# Altium PCB PCB1.PcbDoc
Units mm, origin at the board's own origin, x right, y up, seen from the top; angles counter-clockwise.
Board outline 200 x 140 mm, 4 copper layers (Top Layer, InternalPlane2, InternalPlane1, Bottom Layer); 152 components, 200 nets, 699 pads, 125 vias.
Unrouted connection lines stored in the file: 69.
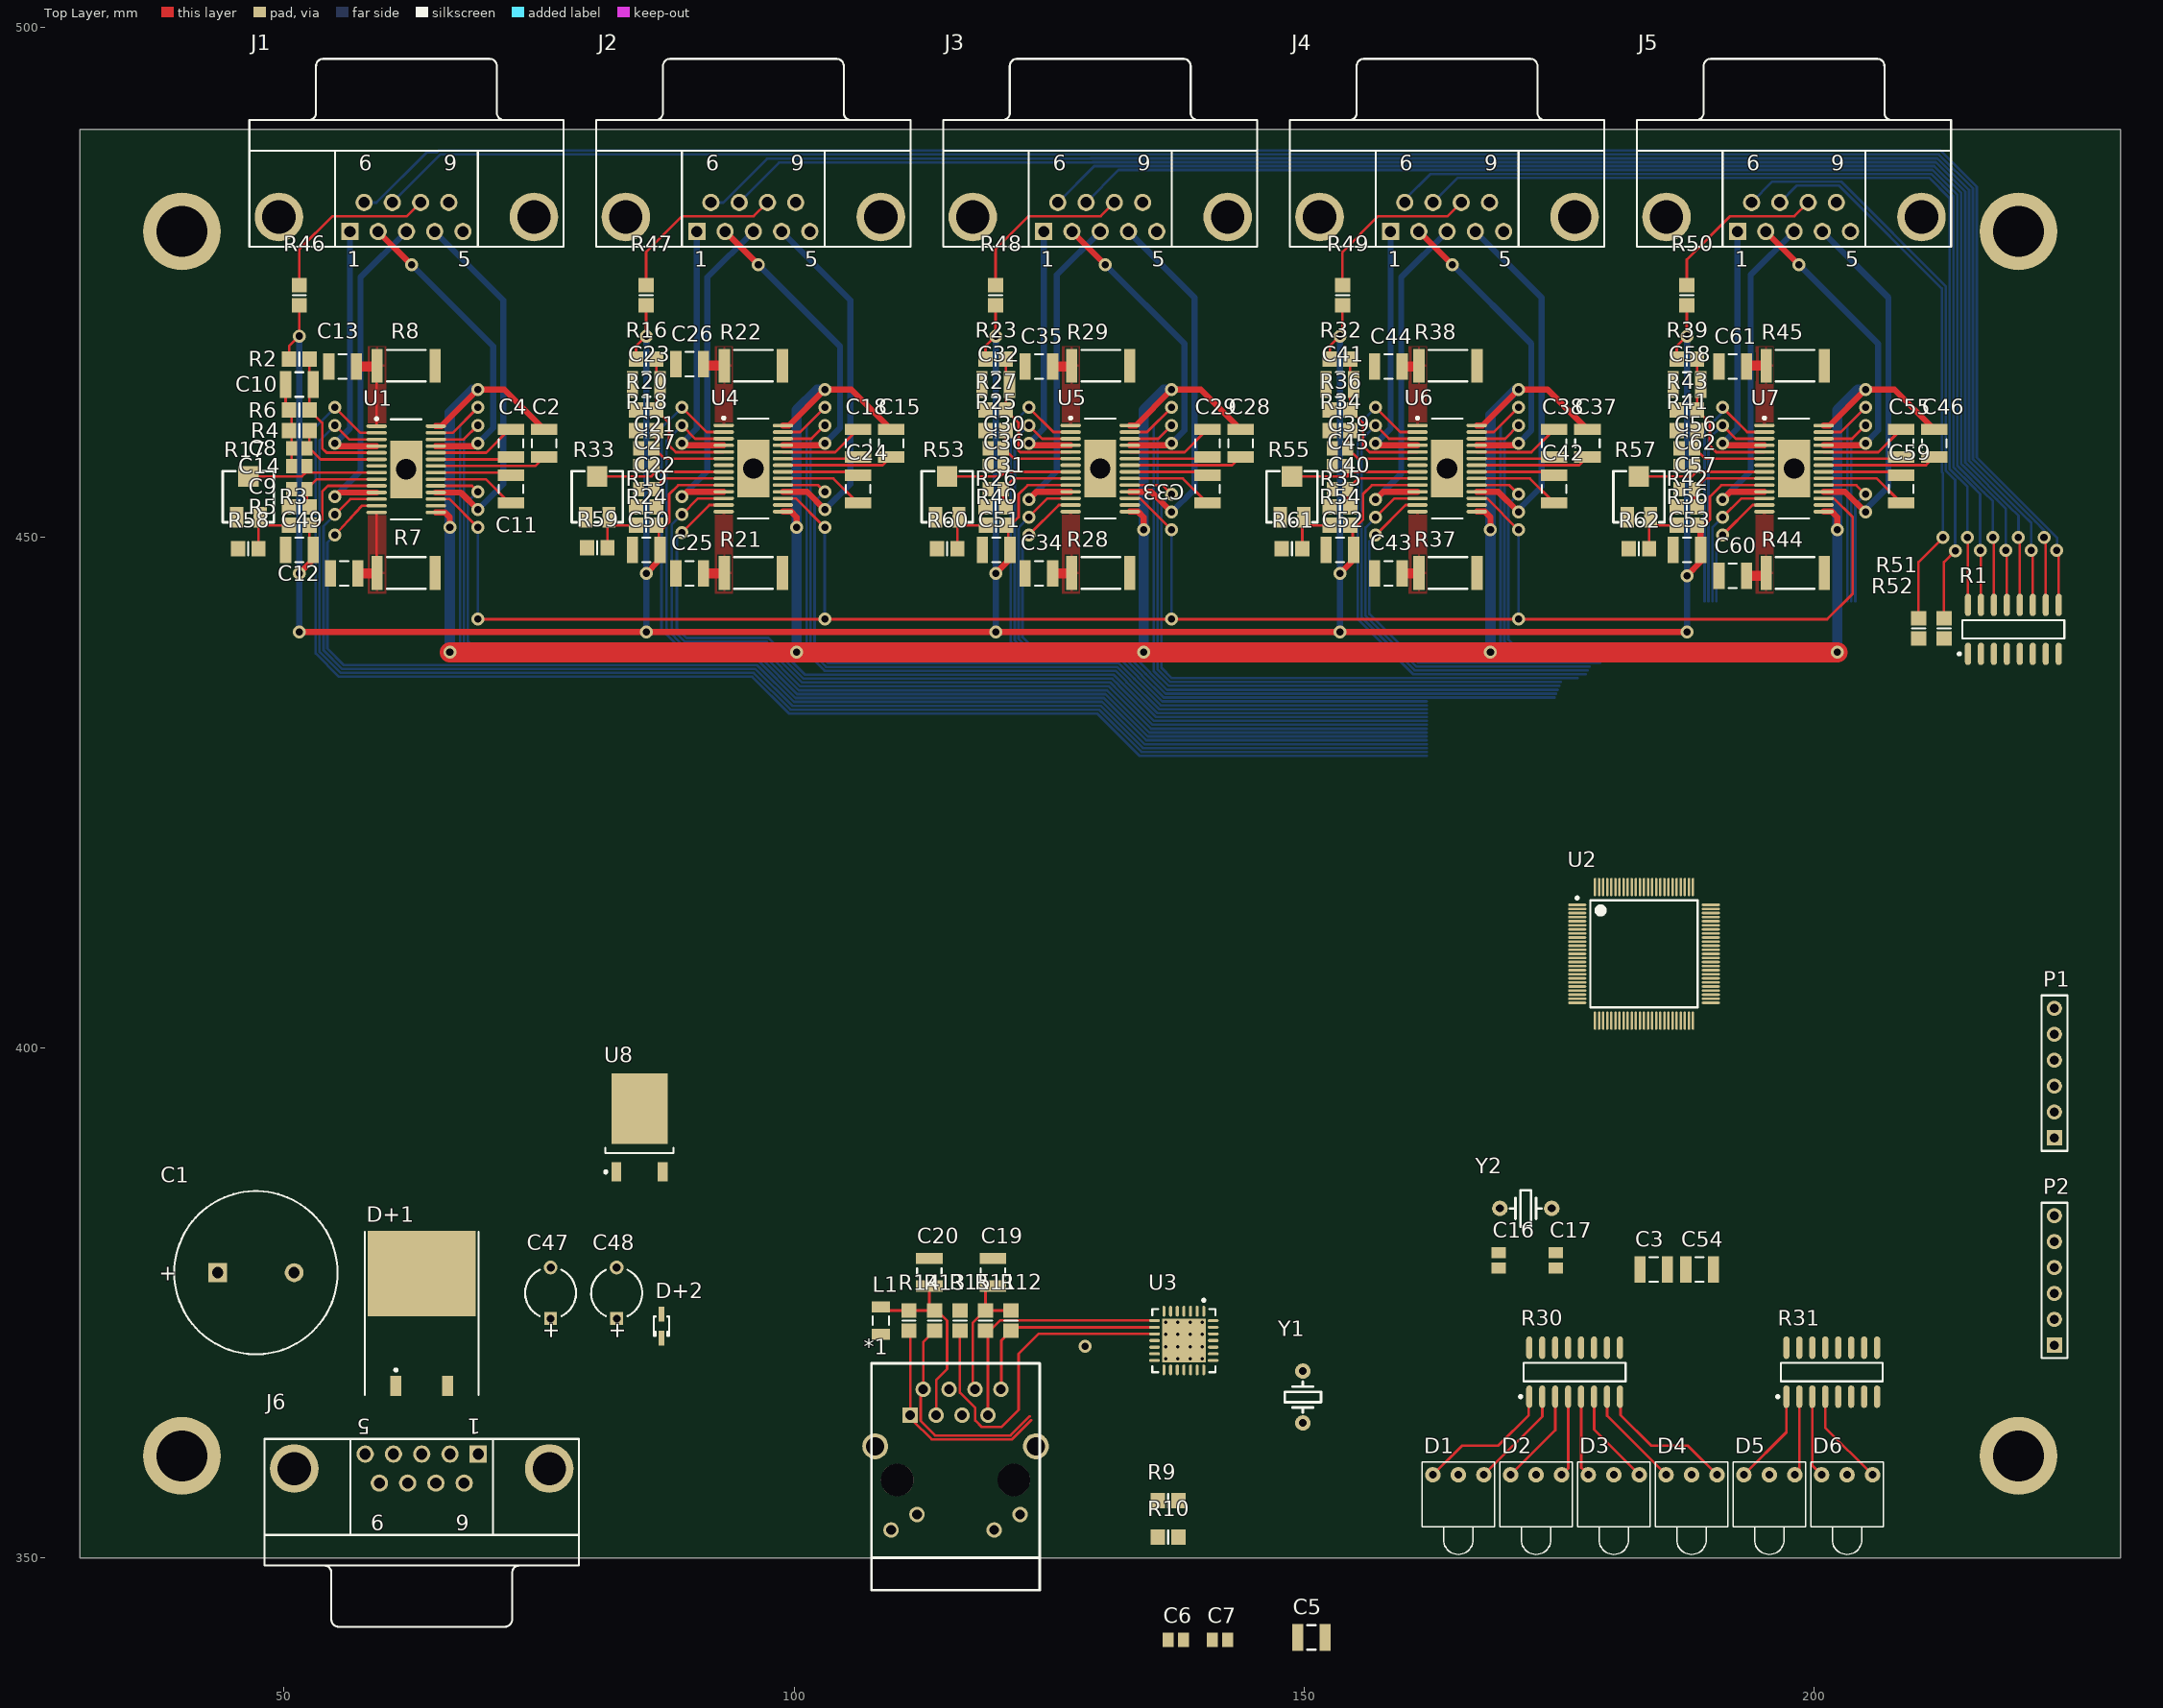
[diagram p0: Top Layer view]
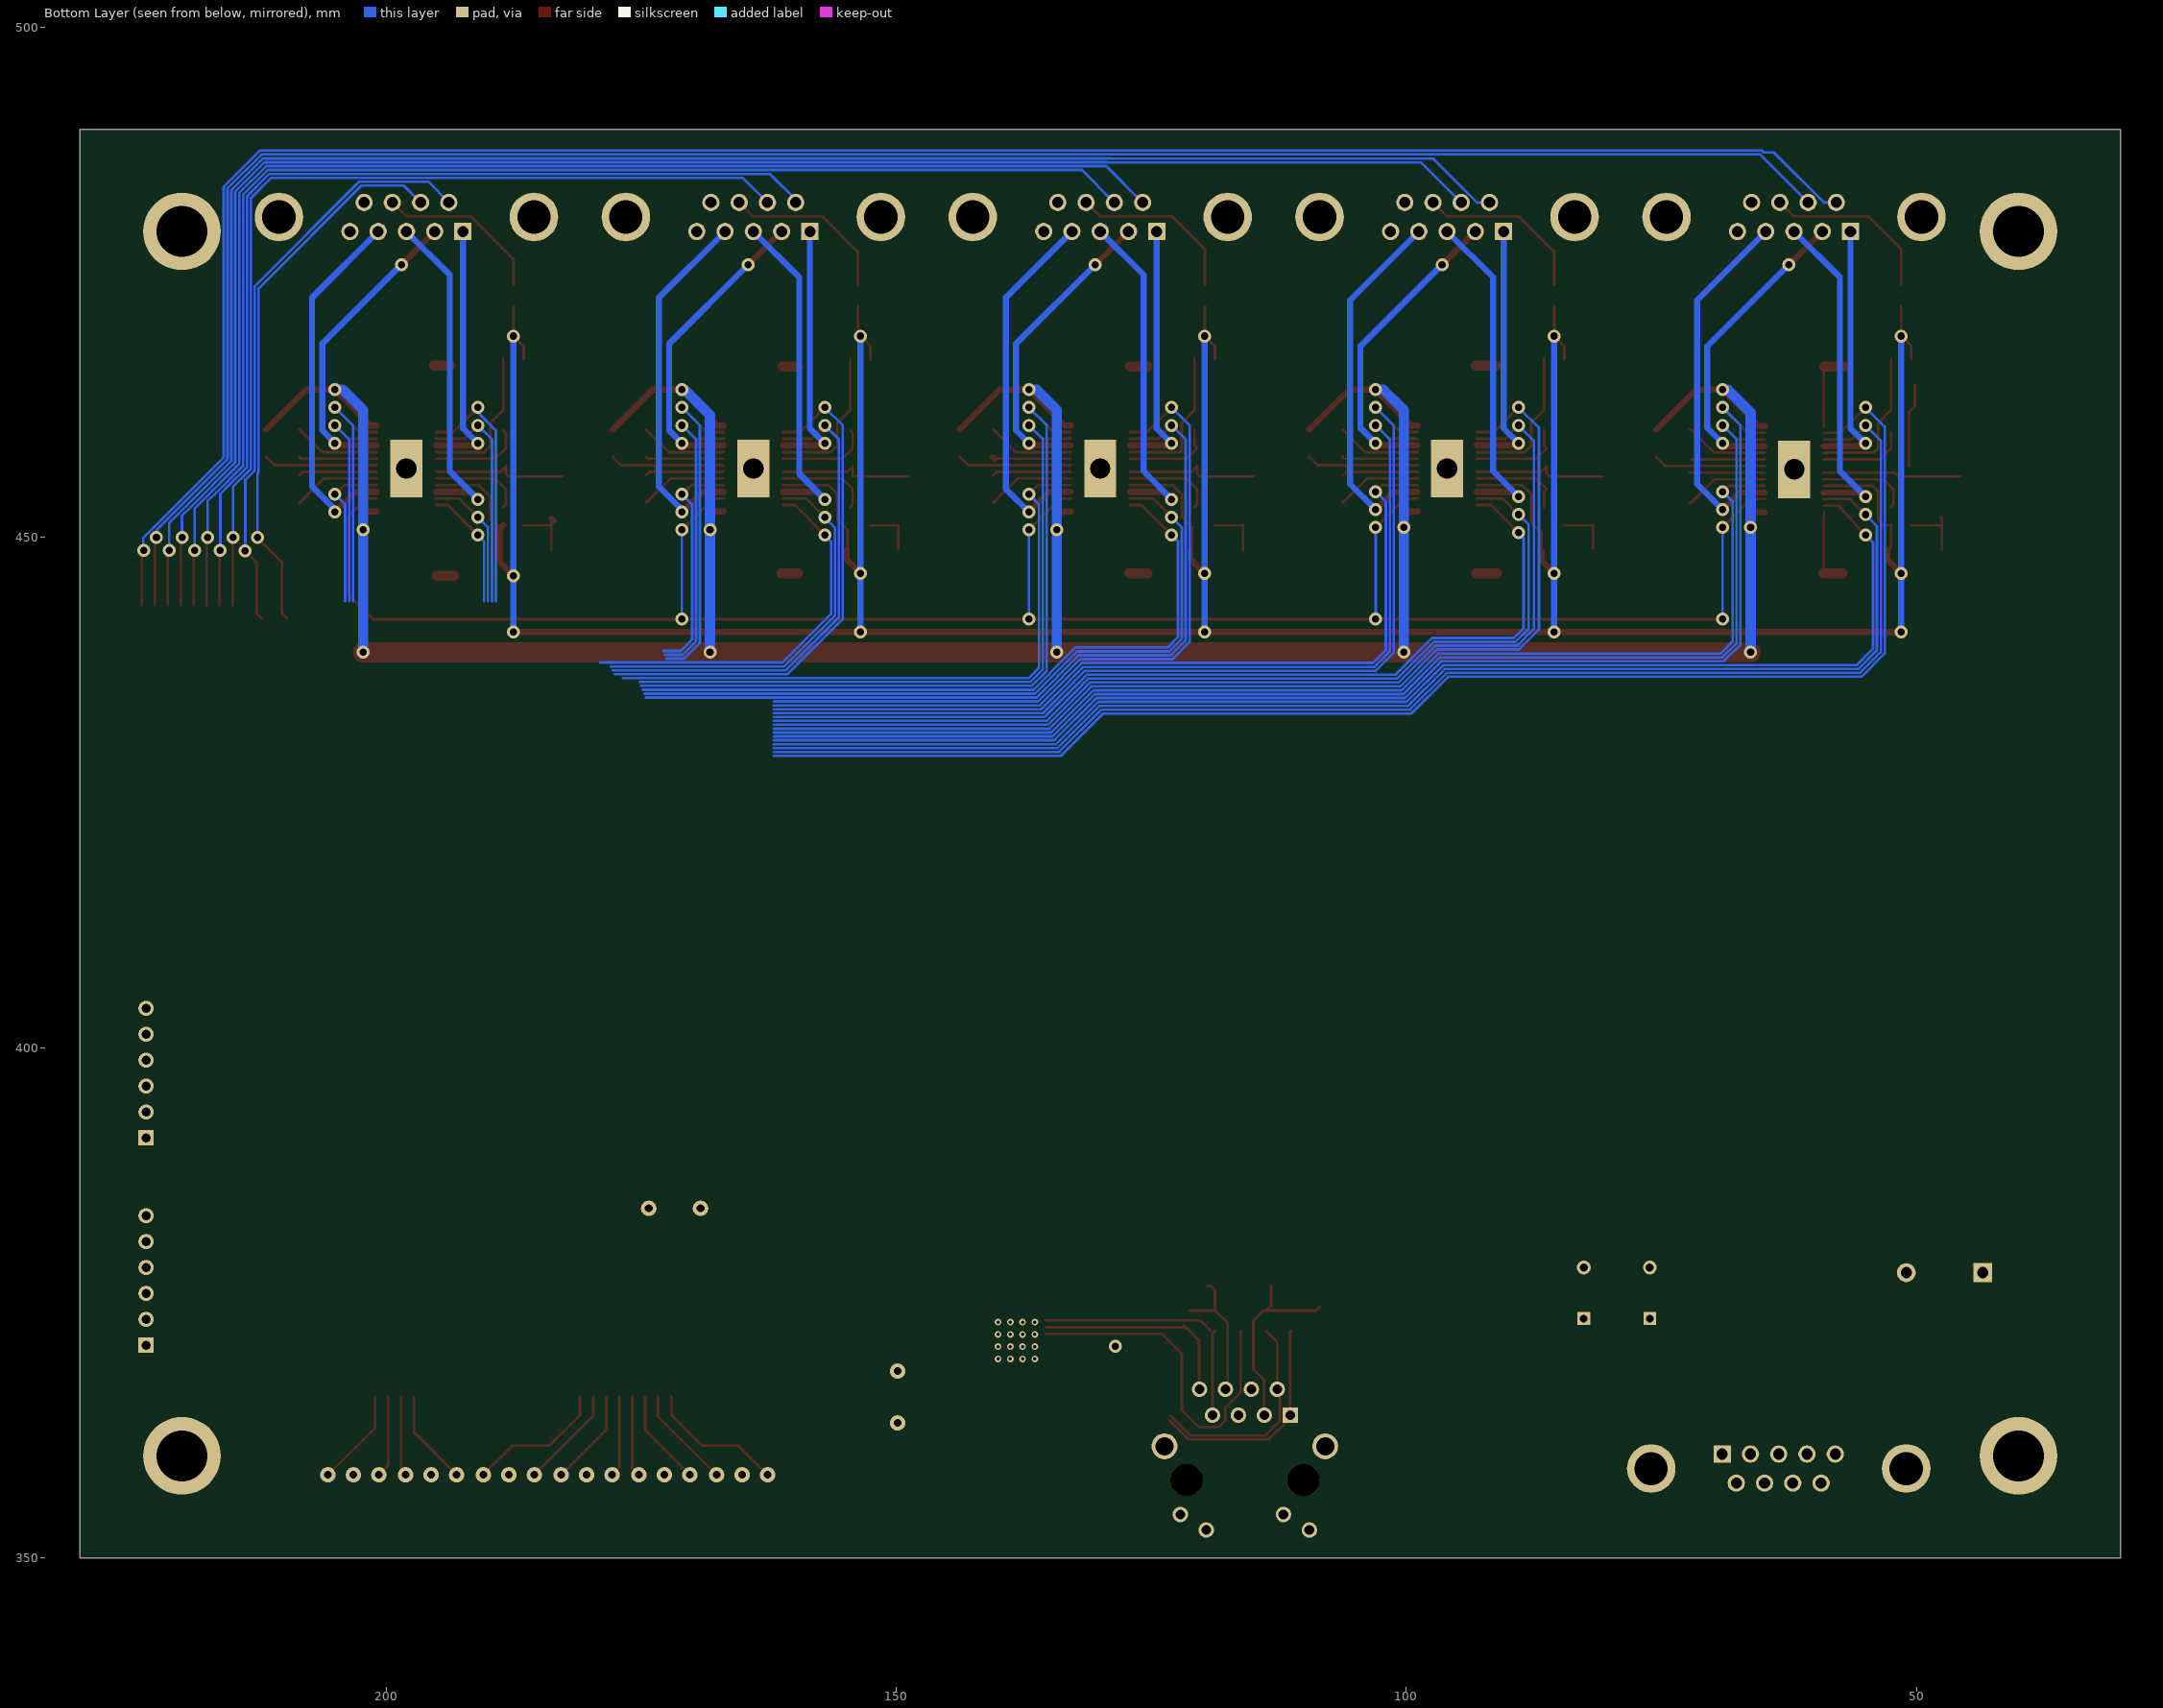
[diagram p1: Bottom Layer view, seen from below]
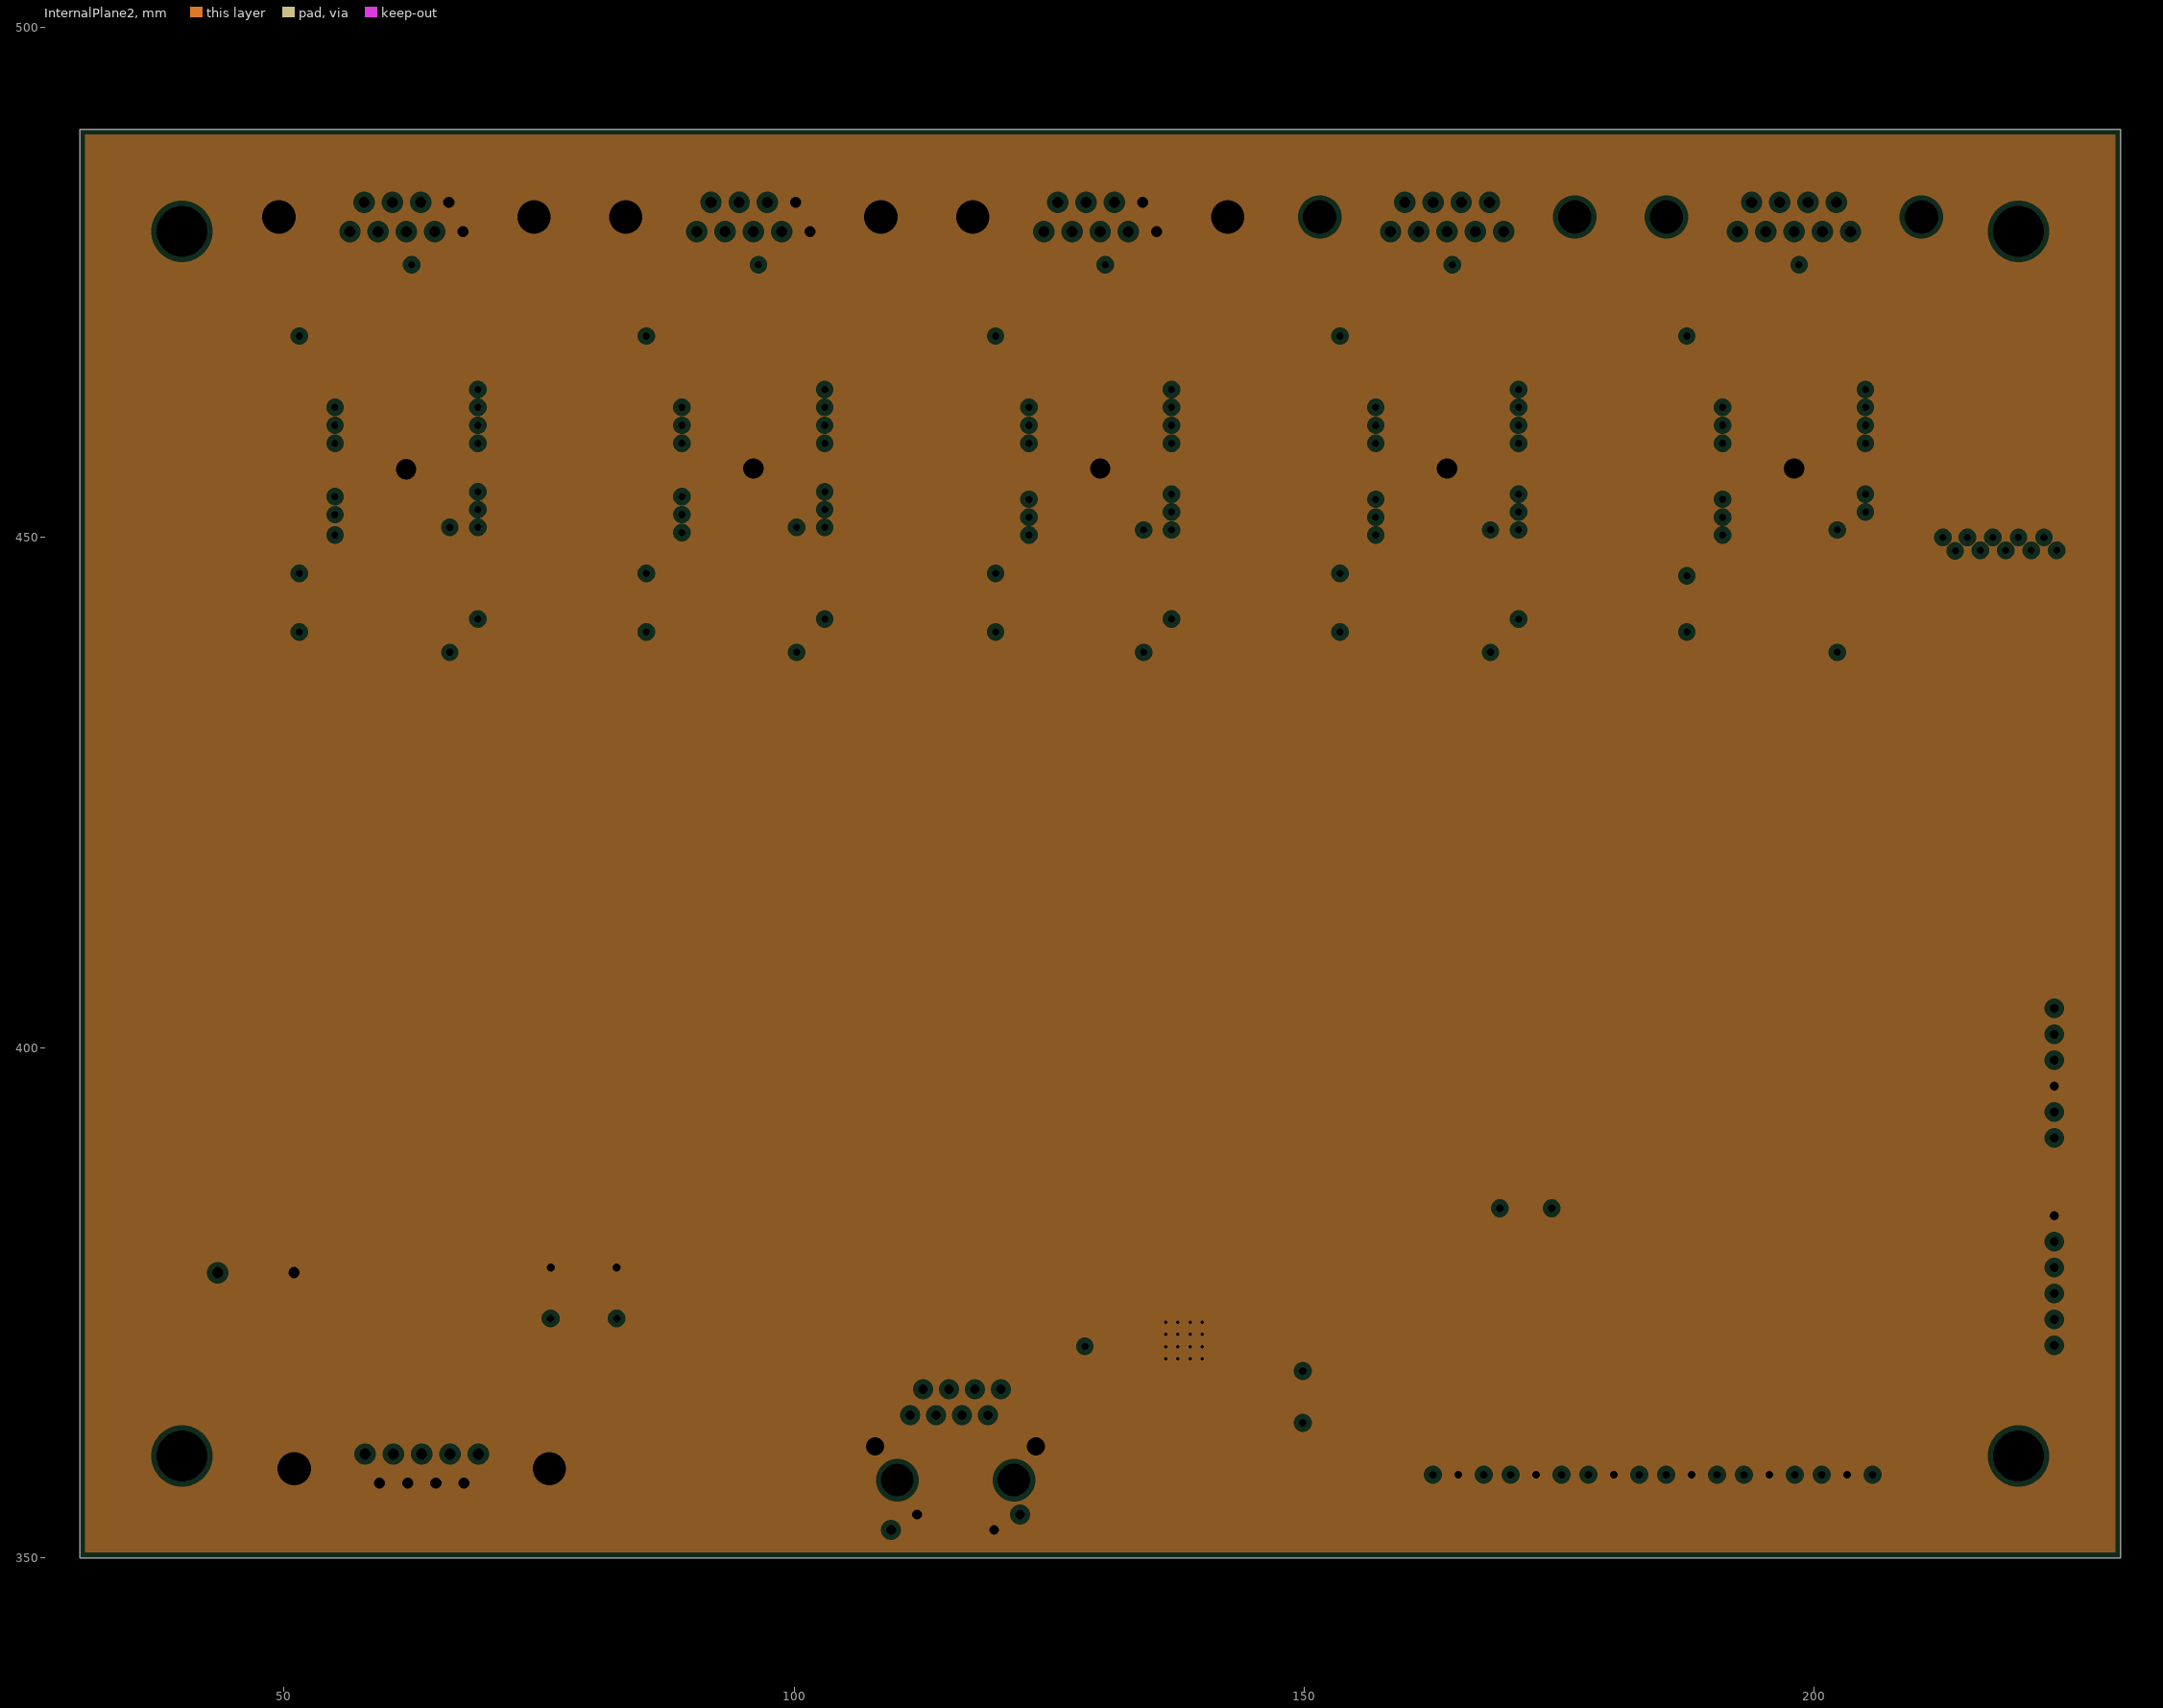
[diagram p2: InternalPlane2, clearances drawn from the general rule]
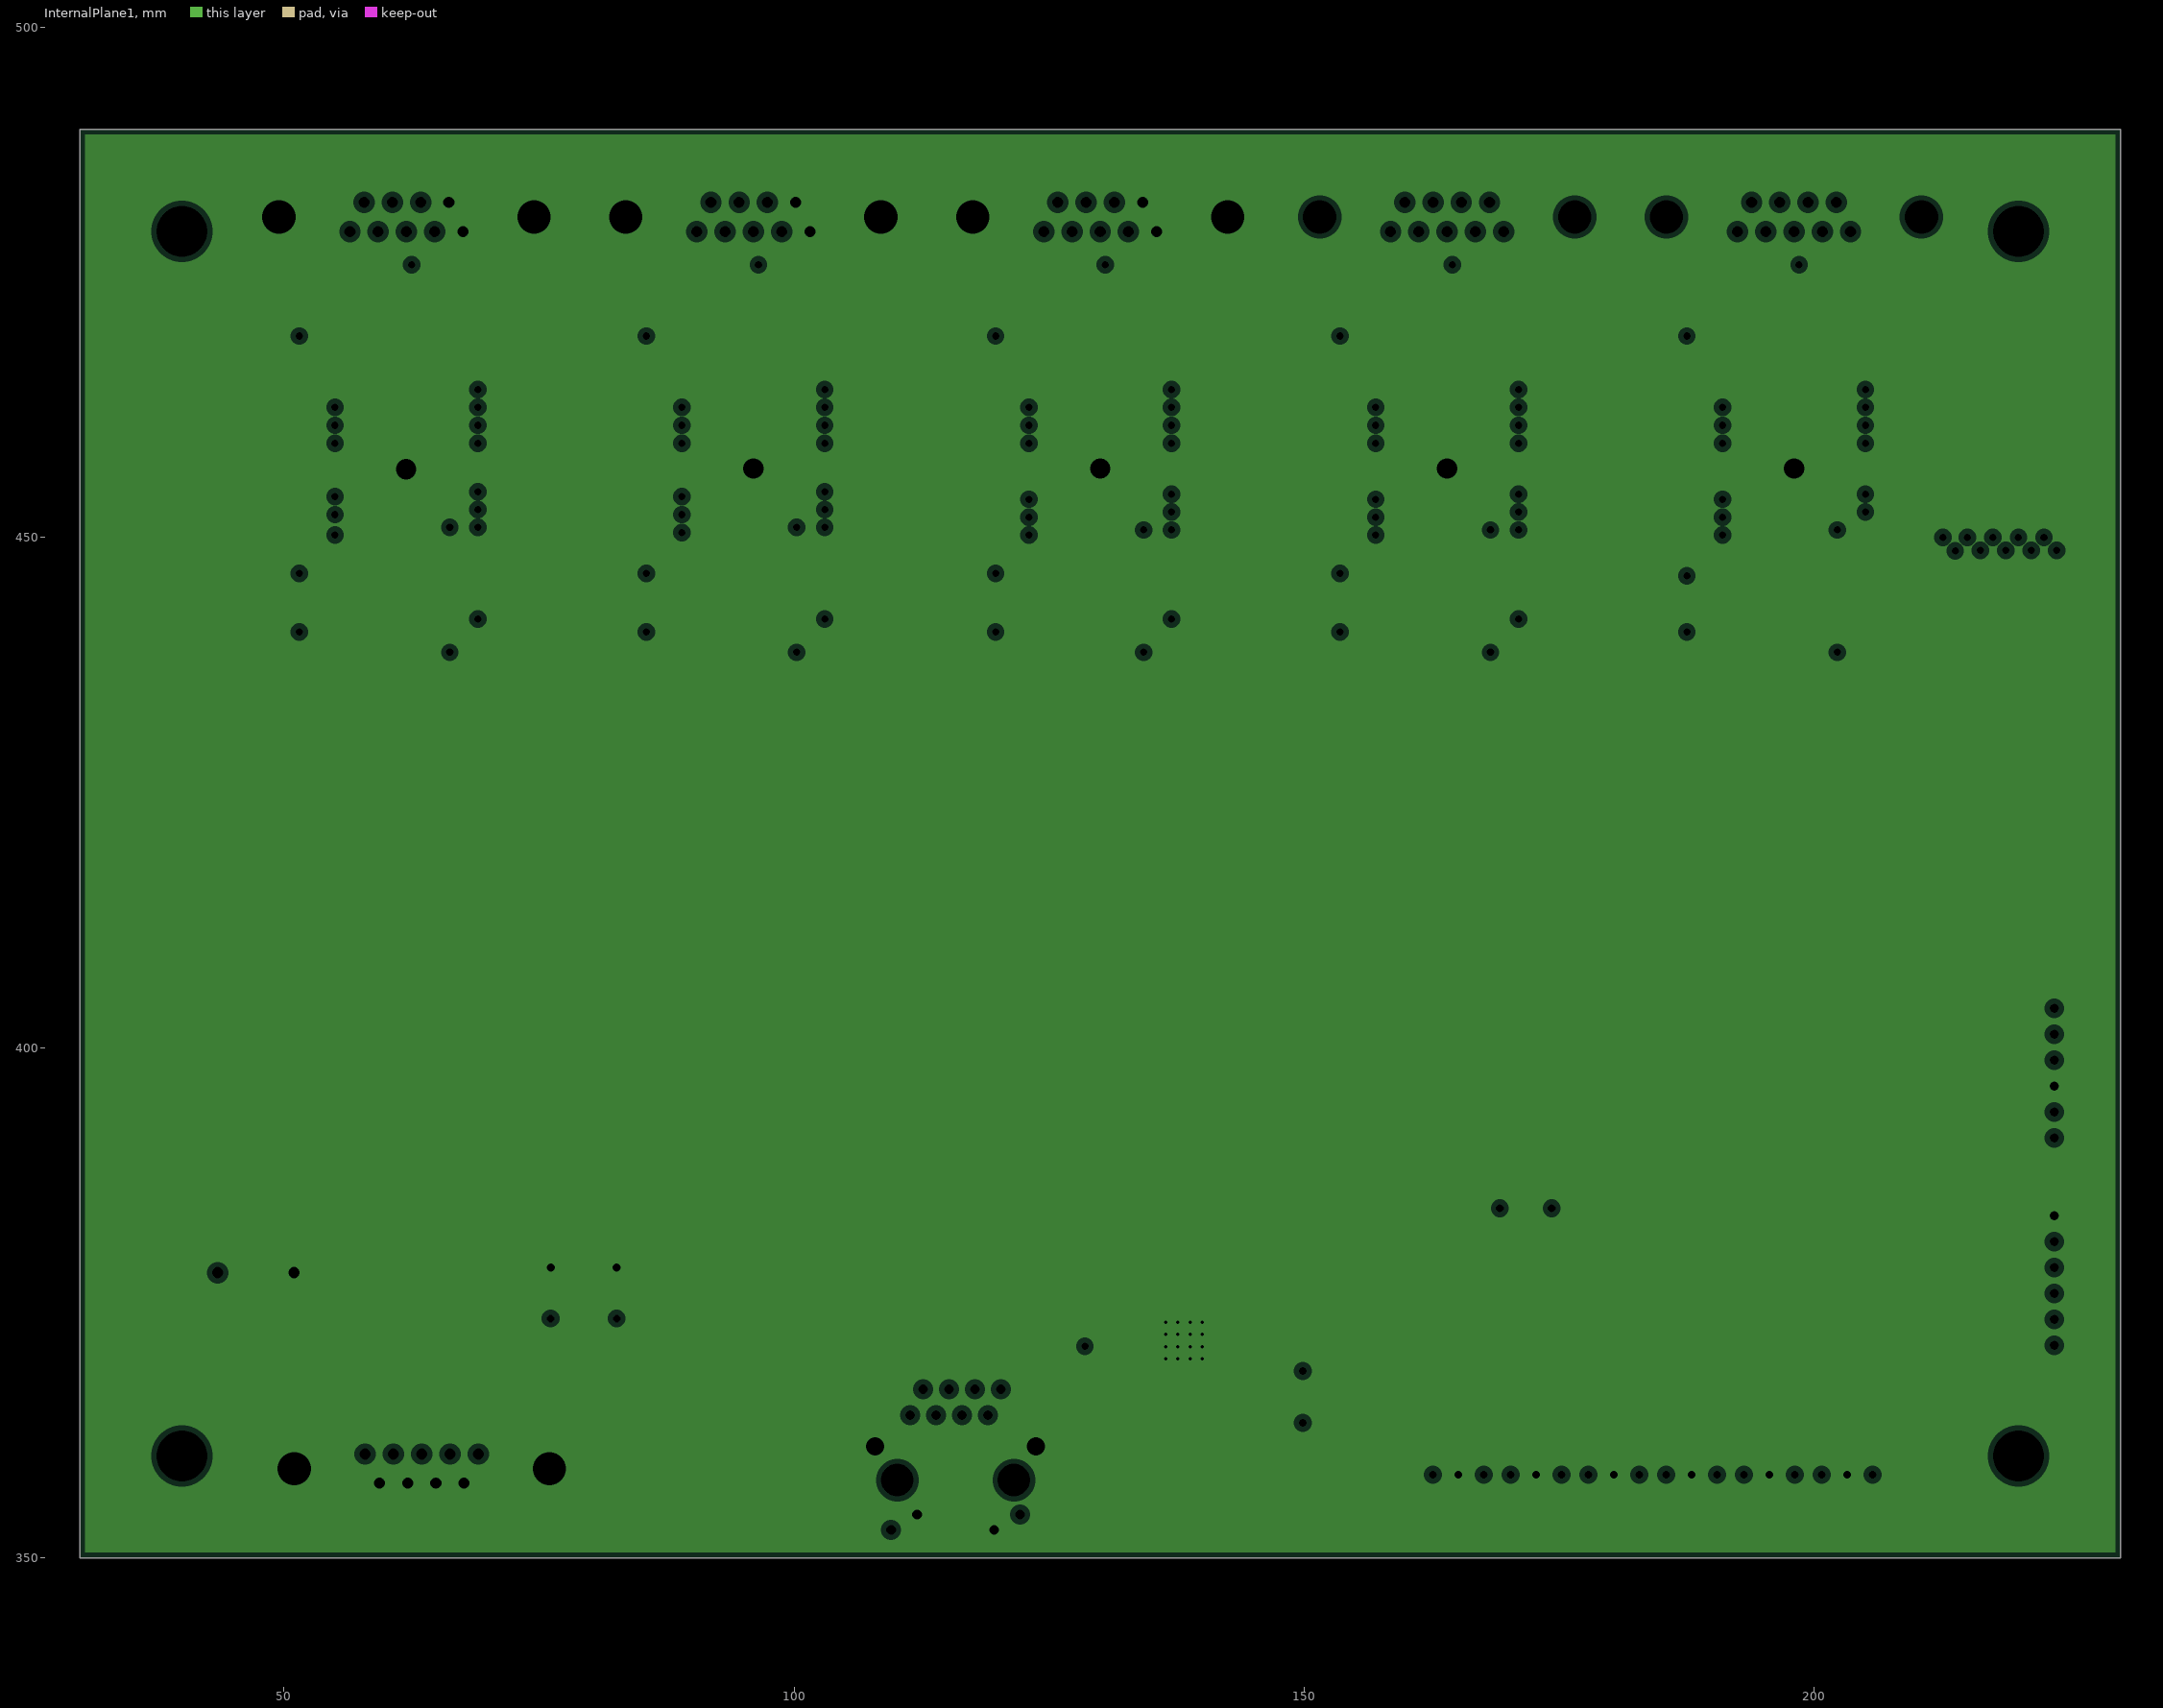
[diagram p3: InternalPlane1, clearances drawn from the general rule]

## Layer stack, top to bottom
Top Layer: signal copper 0.0356
Dielectric: core 0.32, FR-4, Dk 4.8
InternalPlane2: plane copper 0.0356, net GND
Dielectric: prepreg 0.32, FR-4, Dk 4.8
InternalPlane1: plane copper 0.0356, net GND
Dielectric: core 0.32, FR-4, Dk 4.8
Bottom Layer: signal copper 0.0356

## Board outline
30,490 30,350 230,350 230,490 30,490

## Design rules (kind name [scope] priority, off if disabled: settings)
Clearance [All] p1: gap=0.127
PlaneClearance [All] p1: clearance=0.508
PlaneConnect [All] p1: planeconnectstyle=Relief reliefexpansion=0.508 reliefentries=4 reliefconductorwidth=0.254 reliefairgap=0.254
PolygonConnect [All] p1: connectstyle=Relief reliefconductorwidth=0.254 reliefentries=4 polygonreliefangle="90 Angle"
RoomDefinition PIC32MX [InComponentClass('PIC32MX')] p1: confinementstyle=ConfineOut formatcopy=TRUE lockcomponents=FALSE outline 231.25,348.999 259.499,348.999 259.499,358.999 231.25,358.999
RoutingVias [All] p1: holewidth=0.711 width=1.27 viastyle="Through Hole" minholewidth=0.711 minwidth=1.27 maxholewidth=0.711 maxwidth=1.27
SMDNeckDown [All] p1: percent=200.000
SilkscreenOverComponentPads [All] p1: minsilkscreentomaskgap=0.254
SolderMaskExpansion [All] p1: expansion=0.102
Width [All] p1: maxlimit=2 minlimit=0.2 preferedwidth=0.254
25 further rules are at their usual default settings.

## Components (designator, comment, footprint, x,y, rotation, side; value= is the part's Value field where it differs from the comment)
*1 "LU1T516-43" EthernetCON 115.824,357.632 r270 top
C1 "Cap Pol1" CAPPR7.5-16x35 47.244,377.952 r0 top
C2 "Cap" CAPC3225L 75.5,459.25 r90 top
C3 "Cap" CAPC3225L 184.25,378.25 r0 top
C4 "Cap" CapC3225L 72.25,459.25 r270 top
C5 "Cap" CAPC3225L 150.7,342.2 r0 top
C6 "Cap" CAPC2012L 137.414,341.98 r0 top
C7 "Cap" CAPC2012L 141.732,341.98 r0 top
C8 "Cap" CAPC2012L 51.5,458.75 r0 top
C9 "Cap" CAPC2012L 51.5,454.75 r0 top
C10 "Cap" CAPC3225L 51.5,465 r0 top
C11 "Cap" CAPC3225L 72.25,454.75 r270 top
C12 "Cap" CAPC3225L 55.9,446.5 r0 top
C13 "Cap" CAPC3225L 55.75,466.75 r0 top
C14 "Cap" CAPC2012L 51.5,457 r0 top
C15 "Cap" CAPC3225L 109.5,459.25 r90 top
C16 "Cap" CAPC2012L 169.048,379.169 r90 top
C17 "Cap" CAPC2012L 174.636,379.169 r90 top
C18 "Cap" CapC3225L 106.25,459.25 r270 top
C19 "Cap" CAPC3225L 119.5,378 r270 top
C20 "Cap" CAPC3225L 113.25,378 r270 top
C21 "Cap" CAPC2012L 85.5,458.75 r0 top
C22 "Cap" CAPC2012L 85.5,454.75 r0 top
C23 "Cap" CAPC3225L 85.5,465 r0 top
C24 "Cap" CAPC3225L 106.25,454.75 r270 top
C25 "Cap" CAPC3225L 89.75,446.5 r0 top
C26 "Cap" CAPC3225L 89.75,467 r0 top
C27 "Cap" CAPC2012L 85.5,457 r0 top
C28 "Cap" CAPC3225L 143.75,459.25 r90 top
C29 "Cap" CapC3225L 140.5,459.25 r270 top
C30 "Cap" CAPC2012L 119.75,458.75 r0 top
C31 "Cap" CAPC2012L 119.75,454.75 r0 top
C32 "Cap" CAPC3225L 119.75,465 r0 top
C33 "Cap" CAPC3225L 140.5,454.75 r270 top
C34 "Cap" CAPC3225L 124,446.5 r0 top
C35 "Cap" CAPC3225L 124,466.75 r0 top
C36 "Cap" CAPC2012L 119.75,457 r0 top
C37 "Cap" CAPC3225L 177.75,459.25 r90 top
C38 "Cap" CapC3225L 174.5,459.25 r270 top
C39 "Cap" CAPC2012L 153.5,458.75 r0 top
C40 "Cap" CAPC2012L 153.5,454.75 r0 top
C41 "Cap" CAPC3225L 153.5,465 r0 top
C42 "Cap" CAPC3225L 174.5,454.75 r270 top
C43 "Cap" CAPC3225L 158.25,446.5 r0 top
C44 "Cap" CAPC3225L 158.25,466.75 r0 top
C45 "Cap" CAPC2012L 153.5,457 r0 top
C46 "Cap" CAPC3225L 211.75,459.25 r90 top
C47 "Cap Pol1" CAPPR5-5x5 76.129,375.964 r90 top
C48 "Cap Pol1" CAPPR5-5x5 82.606,375.964 r90 top
C49 "Cap" CAPC3225L 51.5,448.8 r180 top
C50 "Cap" CAPC3225L 85.5,448.8 r180 top
C51 "Cap" CAPC3225L 119.8,448.8 r180 top
C52 "Cap" CAPC3225L 153.5,448.8 r180 top
C53 "Cap" CAPC3225L 187.5,448.8 r180 top
C54 "Cap" CAPC3225L 188.75,378.25 r0 top
C55 "Cap" CapC3225L 208.5,459.25 r270 top
C56 "Cap" CAPC2012L 187.5,458.75 r0 top
C57 "Cap" CAPC2012L 187.5,454.75 r0 top
C58 "Cap" CAPC3225L 187.5,465 r0 top
C59 "Cap" CAPC3225L 208.5,454.75 r270 top
C60 "Cap" CAPC3225L 192,446.25 r0 top
C61 "Cap" CAPC3225L 192,466.75 r0 top
C62 "Cap" CAPC2012L 187.5,457 r0 top
D1 "LED3" LED-2-3 165.1,358.14 r0 top
D2 "LED3" LED-2-3 172.72,358.14 r0 top
D3 "LED3" LED-2-3 180.34,358.14 r0 top
D4 "LED3" LED-2-3 187.96,358.14 r0 top
D5 "LED3" LED-2-3 195.58,358.14 r0 top
D6 "LED3" LED-2-3 203.2,358.14 r0 top
D+1 "MBRB1545CT" D2PAK 63.5,372.364 r0 top
D+2 "D Schottky" SOD-323 87,372.7 r270 top
J1 "D Connector 9" D-SUB-9 62,480 r0 top
J2 "D Connector 9" D-SUB-9 96,480 r0 top
J3 "D Connector 9" D-SUB-9 130,480 r0 top
J4 "D Connector 9" D-SUB-9 164,480 r0 top
J5 "D Connector 9" D-SUB-9 198,480 r0 top
J6 "D Connector 9" D-SUB-9 63.5,360.172 r180 top
L1 "Inductor" INDC3216AL 108.5,373.25 r90 top
P1 "Программатор" HDR1X6 223.52,391.16 r90 top
P2 "SPI" HDR1X6 223.52,370.84 r90 top
R1 "Res Pack3" SOIC127P600-16N 219.5,441 r90 top
R2 "Res2" RESC2012M 51.5,467.5 r180 top
R3 "Res2" RESC2012M 51.5,451.2 r0 top
R4 "Res2" RESC2012M 51.5,460.5 r0 top
R5 "Res2" RESC2012M 51.5,453 r0 top
R6 "Res2" RESC2012M 51.5,462.5 r0 top
R7 "Res2" RESC6332L 61.976,446.532 r180 top
R8 "Res2" RESC6332L 61.976,466.852 r180 top
R9 "Res2" RESC2012M 136.652,355.6 r180 top
R10 "Res2" RESC2012M 136.652,352.044 r180 top
R11 "Res2" RESC2012M 118.75,373.25 r270 top
R12 "Res2" RESC2012M 121.25,373.25 r270 top
R13 "Res2" RESC2012M 113.75,373.25 r270 top
R14 "Res2" RESC2012M 111.25,373.25 r270 top
R15 "Res2" RESC2012M 116.25,373.25 r270 top
R16 "Res2" RESC2012M 85.5,467.5 r180 top
R17 "RPot SM" 3314J-1 46.5,454 r180 top
R18 "Res2" RESC2012M 85.5,460.5 r0 top
R19 "Res2" RESC2012M 85.5,453 r0 top
R20 "Res2" RESC2012M 85.5,462.5 r0 top
R21 "Res2" RESC6332L 96.012,446.532 r180 top
R22 "Res2" RESC6332L 96.012,466.852 r180 top
R23 "Res2" RESC2012M 119.75,467.5 r180 top
R24 "Res2" RESC2012M 85.5,451.2 r0 top
R25 "Res2" RESC2012M 119.75,460.5 r0 top
R26 "Res2" RESC2012M 119.75,453 r0 top
R27 "Res2" RESC2012M 119.75,462.5 r0 top
R28 "Res2" RESC6332L 130.048,446.532 r180 top
R29 "Res2" RESC6332L 130.048,466.852 r180 top
R30 "Res Pack3" SOIC127P600-16N 176.5,368.2 r90 top
R31 "Res Pack3" SOIC127P600-16N 201.7,368.2 r90 top
R32 "Res2" RESC2012M 153.5,467.5 r180 top
R33 "RPot SM" 3314J-1 80.7,454 r180 top
R34 "Res2" RESC2012M 153.5,460.5 r0 top
R35 "Res2" RESC2012M 153.5,453 r0 top
R36 "Res2" RESC2012M 153.5,462.5 r0 top
R37 "Res2" RESC6332L 164.084,446.532 r180 top
R38 "Res2" RESC6332L 164.084,466.852 r180 top
R39 "Res2" RESC2012M 187.5,467.5 r180 top
R40 "Res2" RESC2012M 119.8,451.2 r0 top
R41 "Res2" RESC2012M 187.5,460.5 r0 top
R42 "Res2" RESC2012M 187.5,453 r0 top
R43 "Res2" RESC2012M 187.5,462.5 r0 top
R44 "Res2" RESC6332L 198.12,446.532 r180 top
R45 "Res2" RESC6332L 198.12,466.852 r180 top
R46 "Res2" RESC2012M 51.5,473.75 r90 top
R47 "Res2" RESC2012M 85.5,473.75 r90 top
R48 "Res2" RESC2012M 119.75,473.75 r90 top
R49 "Res2" RESC2012M 153.75,473.75 r90 top
R50 "Res2" RESC2012M 187.5,473.75 r90 top
R51 "Res2" RESC2012M 212.7,441.1 r270 top
R52 "Res2" RESC2012M 210.2,441.1 r270 top
R53 "RPot SM" 3314J-1 115,454 r180 top
R54 "Res2" RESC2012M 153.5,451.2 r0 top
R55 "RPot SM" 3314J-1 148.8,454 r180 top
R56 "Res2" RESC2012M 187.5,451.2 r0 top
R57 "RPot SM" 3314J-1 182.8,454 r180 top
R58 "Res2" RESC2012M 46.5,448.9 r0 top
R59 "Res2" RESC2012M 80.7,449 r0 top
R60 "Res2" RESC2012M 115,448.9 r0 top
R61 "Res2" RESC2012M 148.8,448.9 r0 top
R62 "Res2" RESC2012M 182.8,448.9 r0 top
U1 "A3979" TSOP65P640_HS-28AM 61.976,456.692 r0 top
U2 "PIC32MX795F512L-80I/PT" TQFP-PT100_N 183.3,409.2 r0 top
U3 "ENC28J60-I/ML" QFN-ML28_N 138.2,371.3 r270 top
U4 "A3979" TSOP65P640_HS-28AM 96,456.764 r0 top
U5 "A3979" TSOP65P640_HS-28AM 130,456.764 r0 top
U6 "A3979" TSOP65P640_HS-28AM 164,456.764 r0 top
U7 "A3979" TSOP65P640_HS-28AM 198,456.764 r0 top
U8 "LM1117DT-3.3" TD03B_N 84.836,392.176 r90 top
Y1 "XTAL" Quartz 149.86,363.22 r90 top
Y2 "XTAL" Quartz 174.25,384.25 r180 top

## Footprints (in the part's own frame and the unit in brackets; to place one, negate y for a bottom-side part, rotate by r counter-clockwise, add the part's x,y. Pads: shape width x height; smd on the part's side, far side on the other; paste and mask are expansions set on the pad)
3314J-1 [mm] "Trimming Potentiometer"
  rect 1.3x2 smd: CCW(-1.15,2) CW(1.15,2)
  rect 2x2 smd: W(0,-2)
  silkscreen extent -2.5,-2.5 2.5,2.5, body extent -2.22,-2.25 2.28,2.25, height 2.55
CAPC2012L [mm] "Chip Capacitor, Body 2.0x1.3mm, IPC High Density"
  rect 1.1x1.4 smd: 1(-0.75,0) 2(0.75,0)
  body extent -1.1,-0.72 1.1,0.72, height 1.4
CAPC3225L [mm] "Chip Capacitor, Body 3.2x2.5mm, IPC High Density"
  rect 1.1x2.6 smd: 1(-1.35,0) 2(1.35,0)
  silkscreen extent -0.4,-1.2 0.4,1.2, body extent -1.7,-1.35 1.7,1.35, height 1.5
CapC3225L [mm] "Chip Capacitor, Body 3.2x2.5mm, IPC High Density"
  rect 1.1x2.6 smd: 1(-1.35,0) 2(1.35,0)
  silkscreen extent -0.4,-1.2 0.4,1.2, body extent -1.7,-1.35 1.7,1.35, height 1.5
CAPPR5-5x5 [mm] "Capacitor, Electrolytic, Radial; Body 5 x 5 mm (Dia.xH typ); Pin Spacing 5 mm (typ)"
  rect 1.25x1.25 hole 0.75: 1(-2.5,0)
  round 1.35 hole 0.8: 2(2.5,0)
  silkscreen extent -2.26,-2.5 2.27,2.5
CAPPR7.5-16x35 [mm] "Capacitor, Electrolytic, Radial; Body 16 x 35 mm (Dia.xH typ); Pin Spacing 7.5 mm (typ)"
  rect 1.85x1.85 hole 1.1: 1(-3.75,0)
  round 1.85 hole 1.1: 2(3.75,0)
  silkscreen extent -8,-8 8,8
D2PAK [mm] "D2-PAK/TO-263-AB; 3 Leads (1 Cropped); Body 15.5 (inc. leads) x 10.5 mm (LxW max)"
  rect 1.05x2 smd: 1(-2.54,-5.5) 3(2.54,-5.5)
  rect 10.55x8.4 smd: 2(0,5.5)
  silkscreen extent -5.57,-6.4 5.57,9.6
D-SUB-9 [mm] "Connector"
  rect 1.69x1.69 hole 1.09: 1(-5.54,0)
  round 1.69 hole 1.09: 2(-2.77,0) 3(0,0) 4(2.77,0) 5(5.54,0) 6(-4.155,2.84) 7(-1.385,2.84) 8(1.385,2.84) 9(4.155,2.84)
  round 4.76 hole 3.26: 10(-12.495,1.42) 11(12.495,1.42)
  silkscreen extent -15.4,-1.48 15.4,16.92, body extent -15.49,-1.52 15.49,17.02, height 6.35
EthernetCON [mil] "Ethernet connector w/two LEDs"
  rect 60x60 hole 38: 1(-250,-175)
  round 60 hole 38: 2(-350,-125) 3(-250,-75) 4(-350,-25) 5(-250,25) 6(-350,75) 7(-250,125) 8(-350,175) 9(193,-249) 10(133,-149) 11(193,149) 12(133,249)
  round 100 hole 70: 13(-130,-310) 14(-130,310)
  round 125 hole 125 unplated: 15(0,-225) 16(0,225)
  silkscreen extent -450,-325 425,325, body extent -450,-325 425,325, height 550
HDR1X6 [mm] "Connector; Header; 6 Position"
  rect 1.5x1.5 hole 0.9: 1(0,0)
  round 1.5 hole 0.9: 2(2.54,0) 3(5.08,0) 4(7.62,0) 5(10.16,0) 6(12.7,0)
  silkscreen extent -1.27,-1.27 13.97,1.27
INDC3216AL [mm] "Chip Inductor, Body 3.2x1.6mm, IPC High Density"
  rect 1.1x1.8 smd: 1(-1.35,0) 2(1.35,0)
  silkscreen extent -0.4,-0.8 0.4,0.8, body extent -1.7,-0.9 1.7,0.9, height 0.55
LED-2-3 [mil]
  round 60 hole 30: 1(-98.43,0) 2(0,0) 3(98.43,0)
  silkscreen extent -140,-307 140,50, body extent -140,-308 140,50, height 195
QFN-ML28_N [mm] "QFN, 28-Leads, Body 6x6 mm, Pitch 0.65mm, IPC Medium Density"
  oval 1.05x0.3 smd: 1(-2.875,1.95) 2(-2.875,1.3) 3(-2.875,0.65) 4(-2.875,0) 5(-2.875,-0.65) 6(-2.875,-1.3) 7(-2.875,-1.95) 15(2.875,-1.95) 16(2.875,-1.3) 17(2.875,-0.65) 18(2.875,0) 19(2.875,0.65) 20(2.875,1.3) 21(2.875,1.95)
  oval 0.3x1.05 smd: 8(-1.95,-2.875) 9(-1.3,-2.875) 10(-0.65,-2.875) 11(0,-2.875) 12(0.65,-2.875) 13(1.3,-2.875) 14(1.95,-2.875) 22(1.95,2.875) 23(1.3,2.875) 24(0.65,2.875) 25(0,2.875) 26(-0.65,2.875) 27(-1.3,2.875) 28(-1.95,2.875)
  rect 4.3x4.3 smd: 29(0,0)
  silkscreen extent -4.07,-3.1 3.1,3.1, body extent -3.08,-3.08 3.08,3.08, height 1
Quartz [mil]
  round 60 hole 30: 1(0,0) 2(200,0)
  silkscreen extent 40,-70 160,70, body extent -100,-100 300,100, height 90
RESC2012M [mm] "Chip Resistor, Body 2.0x1.2mm, IPC Low Density"
  rect 1.4x1.5 smd: 1(-1,0) 2(1,0)
  silkscreen extent 0,-0.65 0,0.65, body extent -1.07,-0.7 1.07,0.7, height 0.7
RESC6332L [mm] "Chip Resistor, Body 6.3x3.2mm, IPC High Density"
  rect 1.1x3.3 smd: 1(-2.85,0) 2(2.85,0)
  silkscreen extent -1.9,-1.55 1.9,1.55, body extent -3.22,-1.68 3.22,1.68, height 0.9
SOD-323 [mm] "SOD-323/SC-76; 2 Leads; Body 1.7 x 1.3 mm, (LxW)"
  rect 1.45x0.55 smd: 1(1.175,0) 2(-1.175,0)
  silkscreen extent -0.95,-0.75 0.95,0.75
SOIC127P600-16N [mm] "SOIC, 16-Leads, Body 9.9x3.9mm, Pitch 1.27mm, IPC Medium Density"
  oval 2.2x0.6 smd: 1(-2.4,4.445) 2(-2.4,3.175) 3(-2.4,1.905) 4(-2.4,0.635) 5(-2.4,-0.635) 6(-2.4,-1.905) 7(-2.4,-3.175) 8(-2.4,-4.445) 9(2.4,-4.445) 10(2.4,-3.175) 11(2.4,-1.905) 12(2.4,-0.635) 13(2.4,0.635) 14(2.4,1.905) 15(2.4,3.175) 16(2.4,4.445)
  silkscreen extent -2.52,-5 0.9,5.42, body extent -2,-5 2,5, height 1.91
TD03B_N [mm] "D-PAK, 4-Leads, Body 6.1x6.6mm, Pitch 2.29mm, Lead Span 9.7mm, IPC Medium Density"
  rect 1.9x0.95 smd: 1(-4.35,2.28) 3(-4.35,-2.28)
  rect 6.9x5.5 smd: 4(1.85,0)
  silkscreen extent -4.47,-3.35 -2,3.43, body extent -2.5,-3.35 3.7,3.35, height 2.38
TQFP-PT100_N [mm] "Thin QFP, 100-Leads, Body 12x12mm, Pitch 0.4mm, IPC Medium Density"
  oval 1.8x0.24 smd: 1(-6.55,4.8) 2(-6.55,4.4) 3(-6.55,4) 4(-6.55,3.6) 5(-6.55,3.2) 6(-6.55,2.8) 7(-6.55,2.4) 8(-6.55,2) 9(-6.55,1.6) 10(-6.55,1.2) 11(-6.55,0.8) 12(-6.55,0.4) 13(-6.55,0) 14(-6.55,-0.4) 15(-6.55,-0.8) 16(-6.55,-1.2) 17(-6.55,-1.6) 18(-6.55,-2) 19(-6.55,-2.4) 20(-6.55,-2.8) 21(-6.55,-3.2) 22(-6.55,-3.6) 23(-6.55,-4) 24(-6.55,-4.4) 25(-6.55,-4.8) 51(6.55,-4.8) 52(6.55,-4.4) 53(6.55,-4) 54(6.55,-3.6) 55(6.55,-3.2) 56(6.55,-2.8) 57(6.55,-2.4) 58(6.55,-2) 59(6.55,-1.6) 60(6.55,-1.2) 61(6.55,-0.8) 62(6.55,-0.4) 63(6.55,0) 64(6.55,0.4) 65(6.55,0.8) 66(6.55,1.2) 67(6.55,1.6) 68(6.55,2) 69(6.55,2.4) 70(6.55,2.8) 71(6.55,3.2) 72(6.55,3.6) 73(6.55,4) 74(6.55,4.4) 75(6.55,4.8)
  oval 0.24x1.8 smd: 26(-4.8,-6.55) 27(-4.4,-6.55) 28(-4,-6.55) 29(-3.6,-6.55) 30(-3.2,-6.55) 31(-2.8,-6.55) 32(-2.4,-6.55) 33(-2,-6.55) 34(-1.6,-6.55) 35(-1.2,-6.55) 36(-0.8,-6.55) 37(-0.4,-6.55) 38(0,-6.55) 39(0.4,-6.55) 40(0.8,-6.55) 41(1.2,-6.55) 42(1.6,-6.55) 43(2,-6.55) 44(2.4,-6.55) 45(2.8,-6.55) 46(3.2,-6.55) 47(3.6,-6.55) 48(4,-6.55) 49(4.4,-6.55) 50(4.8,-6.55) 76(4.8,6.55) 77(4.4,6.55) 78(4,6.55) 79(3.6,6.55) 80(3.2,6.55) 81(2.8,6.55) 82(2.4,6.55) 83(2,6.55) 84(1.6,6.55) 85(1.2,6.55) 86(0.8,6.55) 87(0.4,6.55) 88(0,6.55) 89(-0.4,6.55) 90(-0.8,6.55) 91(-1.2,6.55) 92(-1.6,6.55) 93(-2,6.55) 94(-2.4,6.55) 95(-2.8,6.55) 96(-3.2,6.55) 97(-3.6,6.55) 98(-4,6.55) 99(-4.4,6.55) 100(-4.8,6.55)
  silkscreen extent -6.67,-5.25 5.25,5.59, body extent -6,-6 6,6, height 1.2
TSOP65P640_HS-28AM [mm] "TSOP, 28-Leads, Body 9.7x4.4mm, Pitch 0.65mm, Exposed Pad, IPC Low Density"
  oval 2x0.35 smd: 1(-2.9,4.225) 2(-2.9,3.575) 3(-2.9,2.925) 4(-2.9,2.275) 5(-2.9,1.625) 6(-2.9,0.975) 7(-2.9,0.325) 8(-2.9,-0.325) 9(-2.9,-0.975) 10(-2.9,-1.625) 11(-2.9,-2.275) 12(-2.9,-2.925) 13(-2.9,-3.575) 14(-2.9,-4.225) 15(2.9,-4.225) 16(2.9,-3.575) 17(2.9,-2.925) 18(2.9,-2.275) 19(2.9,-1.625) 20(2.9,-0.975) 21(2.9,-0.325) 22(2.9,0.325) 23(2.9,0.975) 24(2.9,1.625) 25(2.9,2.275) 26(2.9,2.925) 27(2.9,3.575) 28(2.9,4.225)
  rect 3.15x5.65 hole 2: 29(0,0)
  silkscreen extent -3.02,-4.9 1.5,5.07, body extent -2.25,-4.9 2.25,4.9, height 1.1

## Part data
C1 C47 C48: "Polarized Capacitor (Radial)"
C2 C3 C4 C5 C6 C7 C8 C9 C10 C11 C12 C13 C14 C15 C16 C17 C18 C19 C20 C21 C22 C23 C24 C25 C26 C27 C28 C29 C30 C31 C32 C33 C34 C35 C36 C37 C38 C39 C40 C41 C42 C43 C44 C45 C46 C49 C50 C51 C52 C53 C54 C55 C56 C57 C58 C59 C60 C61 C62: "Capacitor"
D1 D2 D3 D4 D5 D6: "Typical BLUE SiC LED"
D+1: "Schottky Rectifier"
D+2: "Schottky Diode"
J1 J2 J3 J4 J5 J6: "Receptacle Assembly, 9 Position, Right Angle"
P1 P2: library part "Header 6", "Header, 6-Pin"
R1 R30 R31: "Isolated Resistor Network"
R2 R3 R4 R5 R6 R7 R8 R9 R10 R11 R12 R13 R14 R15 R16 R18 R19 R20 R21 R22 R23 R24 R25 R26 R27 R28 R29 R32 R34 R35 R36 R37 R38 R39 R40 R41 R42 R43 R44 R45 R46 R47 R48 R49 R50 R51 R52 R54 R56 R58 R59 R60 R61 R62: "Resistor"
R17 R33 R53 R55 R57: "Square Trimming Potentiometer"
U1 U4 U5 U6 U7: "Microstepping DMOS Driver with Translator 2.5A"
U2: library part PIC32MX795F512L-80I/PT_1, "32-Bit Flash Microcontroller with USB, 85 IOs, 512KB Program Memory, 100-pin TQFP"
U3: "Stand-Alone Ethernet Controller with SPI Interface, 28-Pin QFN, Industrial Temperature"
U8: "800mA Low-Dropout Linear Regulator"
Y1 Y2: "Crystal Oscillator"

## Free pads (board coordinates)
  round 7.62 hole 5: 1(40,360) 1(40,480) 1(220,360) 1(220,480)

## Via types
v1: diameter 1.27, hole 0.711, Top Layer to Bottom Layer, 108 vias
v2: diameter 0.66, hole 0.33, Top Layer to Bottom Layer, tented top, 16 vias
v3: diameter 1.27, hole 0.711, Top Layer to Bottom Layer, tented top, 1 vias

## Nets (pads, with @x,y where several pads share a name; then routed paths per layer and width w, separated by ;. In a path a pad name is that pad's centre, name@x,y a point inside that pad or via, vN(x,y) a via of type N, cw(c..) or ccw(c..) an arc to the next point about the centre after c; other vN are vias at no path point)
+5: C47.1 D+2.2 U8.3
+30: C1.1 C2.2 C15.2 C28.2 C37.2 C46.2 D+1.2 U1.15 U1.28 U4.15 U4.28 U5.15 U5.28 U6.15 U6.28 U7.15 U7.28 | length 355
  Top Layer w0.6: U1.15 65.783,452.467 66.25,452 v1(66.25,451) ; U1.28 65.417,460.917 v1(69,464.5) 71.6,464.5 C2.2 ; U4.15 99.711,452.539 100.25,452 v1(100.25,451) ; U4.28 99.489,460.989 v1(103,464.5) 105.6,464.5 C15.2 ; U5.15 133.711,452.539 134.25,452 v1(134.25,450.75) ; U5.28 133.489,460.989 v1(137,464.5) 139.85,464.5 C28.2 ; U6.15 167.711,452.539 168.25,452 v1(168.25,450.75) ; U6.28 167.489,460.989 v1(171,464.5) 173.85,464.5 C37.2 ; U7.15 201.711,452.539 202.25,452 v1(202.25,450.75) ; U7.28 201.489,460.989 v1(205,464.5) 207.85,464.5 C46.2
  Top Layer w2: v1(66.25,438.75) v1(100.25,438.75) v1(134.25,438.75) v1(168.25,438.75) v1(202.25,438.75)
  Bottom Layer w0.6: v1@170.75,464.5 v1(171,464.5)
  Bottom Layer w1: v1(66.25,438.75) v1(66.25,451) 66.25,462.25 68.5,464.5 v1(69,464.5) ; v1(100.25,438.75) v1(100.25,451) 100.25,462.5 102.25,464.5 v1(103,464.5) ; v1(134.25,438.75) v1(134.25,450.75) 134.25,462.5 136.25,464.5 v1(137,464.5) ; v1(168.25,438.75) v1(168.25,450.75) 168.25,462 v1@170.75,464.5 ; v1(202.25,438.75) v1(202.25,450.75) 202.25,462.5 204.25,464.5 v1(205,464.5)
A_OUT1A: J1.1 U1.4 | length 25.5
  Top Layer w0.6: v1(55,459.25) 55.283,458.967 U1.4
  Bottom Layer w0.6: v1(55,459.25) 56.46,460.71 J1.1
A_OUT1B: J1.2 U1.25 | length 30.3
  Top Layer w0.6: J1.2 62.48,476.75 v1(62.5,476.75) ; U1.25 68.717,458.967 v1(69,459.25)
  Bottom Layer w0.6: v1(62.5,476.75) 70.5,468.75 70.5,460.75 v1(69,459.25)
A_OUT2A: J1.3 U1.11 | length 33.1
  Top Layer w0.6: v1(55,454) 55.417,454.417 U1.11
  Bottom Layer w0.6: v1(55,454) 57.5,456.5 57.5,475.5 J1.3
A_OUT2B: J1.4 U1.18 | length 35.9
  Top Layer w0.6: U1.18 67.333,454.417 v1(69,452.75)
  Bottom Layer w0.6: J1.4 71.5,473.27 71.5,455.25 v1(69,452.75)
B_OUT1A: J2.1 U4.4 | length 25.5
  Top Layer w0.254: v1(89,459.25) v1@89.211,459.039
  Top Layer w0.6: v1@89.211,459.039 U4.4
  Bottom Layer w0.6: v1(89,459.25) 90.46,460.71 J2.1
B_OUT1B: J2.2 U4.25 | length 30.2
  Top Layer w0.6: J2.2 93.25,480 v1(96.5,476.75) ; U4.25 102.789,459.039 v1(103,459.25)
  Bottom Layer w0.6: v1(96.5,476.75) 104.5,468.75 104.5,460.75 v1(103,459.25)
B_OUT2A: J2.3 U4.11 | length 33.2
  Top Layer w0.6: v1(89,454) 89.489,454.489 U4.11
  Bottom Layer w0.6: v1(89,454) 91.5,456.5 91.5,475.5 J2.3
B_OUT2B: J2.4 U4.18 | length 35.9
  Top Layer w0.6: U4.18 101.261,454.489 v1(103,452.75)
  Bottom Layer w0.6: J2.4 105.5,473.27 105.5,455.25 v1(103,452.75)
C_LED_ERR: R30.9
C_OUT1A: J3.1 U5.4 | length 25.5
  Top Layer w0.254: v1(123,459.25) v1@123.211,459.039
  Top Layer w0.6: v1@123.211,459.039 U5.4
  Bottom Layer w0.6: v1(123,459.25) 124.46,460.71 J3.1
C_OUT1B: J3.2 U5.25 | length 30
  Top Layer w0.254: v1@136.789,459.039 v1(137,459.25)
  Top Layer w0.6: J3.2 127.25,480 v1(130.5,476.75) ; U5.25 v1@136.789,459.039
  Bottom Layer w0.6: v1(130.5,476.75) 138.25,469 138.25,460.5 v1(137,459.25)
C_OUT2A: J3.3 U5.11 | length 33.6
  Top Layer w0.6: v1(123,453.75) 123.739,454.489 U5.11
  Bottom Layer w0.6: v1(123,453.75) 125.75,456.5 125.75,475.75 J3.3
C_OUT2B: J3.4 U5.18 | length 36
  Top Layer w0.6: U5.18 135.011,454.489 v1(137,452.5)
  Bottom Layer w0.6: J3.4 139.25,473.52 139.25,454.75 v1(137,452.5)
D_OUT1A: J4.1 U6.4 | length 25.5
  Top Layer w0.6: v1(157,459.25) 157.211,459.039 U6.4
  Bottom Layer w0.6: v1(157,459.25) 158.46,460.71 J4.1
D_OUT1B: J4.2 U6.25 | length 30
  Top Layer w0.254: v1@170.789,459.039 v1(171,459.25)
  Top Layer w0.6: J4.2 161.25,480 v1(164.5,476.75) ; U6.25 v1@170.789,459.039
  Bottom Layer w0.6: v1(164.5,476.75) 172.25,469 172.25,460.5 v1(171,459.25)
D_OUT2A: J4.3 U6.11 | length 33.6
  Top Layer w0.6: v3(157,453.75) 157.739,454.489 U6.11
  Bottom Layer w0.6: v3(157,453.75) 159.5,456.25 159.5,475.5 J4.3
D_OUT2B: J4.4 U6.18 | length 36
  Top Layer w0.6: U6.18 169.011,454.489 v1(171,452.5)
  Bottom Layer w0.6: J4.4 173.25,473.52 173.25,454.998 171,452.748 v1(171,452.5)
DRV_A_DIR: U1.3 | length 140.1
  Top Layer w0.254: v1(55,461) 56.383,459.617 U1.3
  Bottom Layer w0.254: v1(55,461) 53.488,459.488 53.488,438.801 55.551,436.738 96.051,436.738 99.658,433.131 129.882,433.131 134.026,428.987 162,428.987
DRV_A_ENA: U1.26 | length 124.8
  Top Layer w0.254: U1.26 67.617,459.617 v1(69,461)
  Bottom Layer w0.254: v1(69,461) 67.631,459.631 67.631,439.658 69.027,438.262 96.682,438.262 100.289,434.655 130.513,434.655 134.657,430.511 162,430.511
DRV_A_HOME: U1.2 | length 143
  Top Layer w0.254: v1(55,462.75) 57.483,460.267 U1.2
  Bottom Layer w0.254: v1(55,462.75) 53.107,460.857 53.107,438.643 55.393,436.357 95.893,436.357 99.5,432.75 129.724,432.75 133.868,428.606 162,428.606
DRV_A_MS1: U1.13 | length 128.4
  Top Layer w0.254: v1(55,450.25) 57.617,453.117 U1.13
  Bottom Layer w0.254: v1(55,450.25) 54.25,449.5 54.25,439.116 55.866,437.5 96.366,437.5 99.973,433.893 130.197,433.893 134.341,429.749 162,429.749
DRV_A_MS2: U1.12 | length 130.6
  Top Layer w0.254: v1(55,452.25) 56.517,453.767 U1.12
  Bottom Layer w0.254: v1(55,452.25) 53.869,451.119 53.869,438.959 55.709,437.119 96.209,437.119 99.816,433.512 130.039,433.512 134.183,429.368 162,429.368
DRV_A_SLP: U1.27 | length 127.8
  Top Layer w0.254: U1.27 66.517,460.267 v1(69,462.75)
  Bottom Layer w0.254: v1(69,462.75) 67.25,461 67.25,439.5 68.869,437.881 96.524,437.881 100.131,434.274 130.355,434.274 134.499,430.13 162,430.13
DRV_A_STEP: U1.19 | length 117.1
  Top Layer w0.254: U1.19 68.433,455.067 v1(69,454.5)
  Bottom Layer w0.254: v1(69,454.5) 68.012,453.512 68.012,439.816 69.185,438.643 96.84,438.643 100.447,435.036 130.671,435.036 134.815,430.892 162,430.892
DRV_B_DIR: U4.3 | length 103.6
  Top Layer w0.254: v1(89,461) 90.311,459.689 U4.3
  Bottom Layer w0.254: v1(89,461) 87.5,459.5 87.5,441.039 89.134,439.405 97.156,439.405 100.763,435.798 131.013,435.798 131.428,435.383 131.428,435.356 135.13,431.654 162,431.654
DRV_B_ENA: U4.26 | length 90.1
  Top Layer w0.254: U4.26 101.689,459.689 v1(103,461)
  Bottom Layer w0.254: v1(103,461) 101.619,459.619 101.619,438.842 103.139,437.322 131.644,437.322 132.952,436.014 132.952,435.987 135.761,433.178 162,433.178
DRV_B_HOME: U4.2 | length 106.7
  Top Layer w0.254: v1(89,462.75) 91.411,460.339 U4.2
  Bottom Layer w0.254: v1(89,462.75) 87,460.75 87,441 88.976,439.024 96.998,439.024 100.605,435.417 130.855,435.417 131.047,435.225 131.047,435.198 134.972,431.273 162,431.273
DRV_B_MS1: U4.13 | length 91.9
  Top Layer w0.254: v1(89,450.5) 91.689,453.189 U4.13
  Bottom Layer w0.254: v1(89,450.5) 88.5,450 88.5,441.116 89.449,440.167 97.471,440.167 101.078,436.56 131.328,436.56 132.19,435.698 132.19,435.672 135.446,432.416 162,432.416
DRV_B_MS2: U4.12 | length 94.1
  Top Layer w0.254: v1(89,452.25) 90.589,453.839 U4.12
  Bottom Layer w0.254: v1(89,452.25) 88,451.25 88,441.078 89.292,439.786 97.313,439.786 100.92,436.179 131.17,436.179 131.809,435.54 131.809,435.514 135.288,432.035 162,432.035
DRV_B_SLP: U4.27 | length 93.1
  Top Layer w0.254: U4.27 100.589,460.339 v1(103,462.75)
  Bottom Layer w0.254: v1(103,462.75) 101.238,460.988 101.238,438.684 102.981,436.941 131.486,436.941 132.571,435.856 132.571,435.83 135.604,432.797 162,432.797
DRV_B_STEP: U4.19 | length 82.5
  Top Layer w0.254: U4.19 102.361,455.139 v1(103,454.5)
  Bottom Layer w0.254: v1(103,454.5) 102,453.5 102,439 103.297,437.703 131.802,437.703 133.333,436.172 133.333,436.145 135.919,433.559 162,433.559
DRV_C_DIR: U5.3 | length 81.5
  Top Layer w0.254: v1(123,461) 124.311,459.689 U5.3
  Bottom Layer w0.254: v1(123,461) 121.619,459.619 121.619,439.92 123.074,438.465 132.117,438.465 134.095,436.487 134.095,436.461 136.235,434.321 174.524,434.321
DRV_C_ENA: U5.26 | length 69.2
  Top Layer w0.254: U5.26 135.689,459.689 v1(137,461)
  Bottom Layer w0.254: v1(137,461) 135.619,459.619 135.619,437.092 136.866,435.845 175.155,435.845
DRV_C_HOME: U5.2 | length 72
  Top Layer w0.254: v1(123,462.75) 125.411,460.339 U5.2
  Bottom Layer w0.254: v1(123,462.75) 121.238,460.988 121.238,439.762 122.916,438.084 131.959,438.084 133.714,436.329 133.714,436.303 136.077,433.94 162,433.94
DRV_C_MS1: U5.13 | length 70.2
  Top Layer w0.254: v1(123,450.25) 125.939,453.189 U5.13
  Bottom Layer w0.254: v1(123,450.25) 122.381,449.631 122.381,440.235 123.389,439.227 132.433,439.227 134.857,436.803 134.857,436.777 136.551,435.083 174.839,435.083
DRV_C_MS2: U5.12 | length 72.1
  Top Layer w0.254: v1(123,452) 124.839,453.839 U5.12
  Bottom Layer w0.254: v1(123,452) 122,451 122,440.078 123.232,438.846 132.275,438.846 134.476,436.645 134.476,436.619 136.393,434.702 174.682,434.702
DRV_C_SLP: U5.27 | length 72
  Top Layer w0.254: U5.27 134.589,460.339 v1(137,462.75)
  Bottom Layer w0.254: v1(137,462.75) 135.238,460.988 135.238,436.934 136.708,435.464 174.997,435.464
DRV_C_STEP: U5.19 | length 63.1
  Top Layer w0.254: U5.19 136.111,455.139 v1(137,454.25)
  Bottom Layer w0.254: v1(137,454.25) 136,453.25 136,437.25 137.024,436.226 160.5,436.226 176.774,436.226
DRV_D_DIR: U6.3 | length 48.3
  Top Layer w0.254: v1(157,461) 158.311,459.689 U6.3
  Bottom Layer w0.254: v1(157,461) 155.619,459.619 155.619,442.184 160.815,436.988 177.762,436.988
DRV_D_ENA: U6.26 | length 30
  Top Layer w0.254: U6.26 169.689,459.689 v1(171,461)
  Bottom Layer w0.254: v1(171,461) 169.619,459.619 169.619,439.842 170.949,438.512 172.682,438.512
DRV_D_HOME: U6.2 | length 51.2
  Top Layer w0.254: v1(157,462.75) 159.411,460.339 U6.2
  Bottom Layer w0.254: v1(157,462.75) 155.238,460.988 155.238,442.027 160.658,436.607 177.604,436.607
DRV_D_MS1: U6.13 | length 37.9
  Top Layer w0.254: v1(157,450.25) 159.939,453.189 U6.13
  Bottom Layer w0.254: v1(157,450.25) 156.381,449.631 156.381,442.5 161.131,437.75 179,437.75
DRV_D_MS2: U6.12 | length 39
  Top Layer w0.254: v1(157,452) 158.839,453.839 U6.12
  Bottom Layer w0.254: v1(157,452) 156,451 156,442.342 160.973,437.369 177.975,437.369
DRV_D_SLP: U6.27 | length 32.8
  Top Layer w0.254: U6.27 168.589,460.339 v1(171,462.75)
  Bottom Layer w0.254: v1(171,462.75) 169.238,460.988 169.238,439.684 170.791,438.131 172.524,438.131
DRV_D_STEP: U6.19 | length 22.4
  Top Layer w0.254: U6.19 170.111,455.139 v1(171,454.25)
  Bottom Layer w0.254: v1(171,454.25) 170,453.25 170,440 171.107,438.893 172.84,438.893
DRV_E_DIR: U7.3 | length 22.5
  Top Layer w0.254: v1(191,461) 192.311,459.689 U7.3
  Bottom Layer w0.254: 189.619,443.75 189.619,459.619 v1(191,461)
DRV_E_ENA: U7.26 | length 22.5
  Top Layer w0.254: U7.26 203.689,459.689 v1(205,461)
  Bottom Layer w0.254: 203.619,443.75 203.619,459.619 v1(205,461)
DRV_E_HOME: U7.2 | length 24.8
  Top Layer w0.254: v1(191,462.75) 193.411,460.339 U7.2
  Bottom Layer w0.254: 189.238,443.75 189.238,460.495 191,462.257 v1(191,462.75)
DRV_E_MS1: U7.13 | length 12.1
  Top Layer w0.254: v1(191,450.25) 193.939,453.189 U7.13
  Bottom Layer w0.254: 190.381,443.75 190.381,449.631 v1(191,450.25)
DRV_E_MS2: U7.12 | length 13.5
  Top Layer w0.254: v1(191,452) 192.839,453.839 U7.12
  Bottom Layer w0.254: 190,443.75 190,451 v1(191,452)
DRV_E_SLP: U7.27 | length 24.8
  Top Layer w0.254: U7.27 202.589,460.339 v1(205,462.75)
  Bottom Layer w0.254: 203.238,443.75 203.238,460.988 v1(205,462.75)
DRV_E_STEP: U7.19 | length 15.4
  Top Layer w0.254: U7.19 204.111,455.139 v1(205,454.25)
  Bottom Layer w0.254: 204,443.75 204,453.25 v1(205,454.25)
DRV_RESET: U1.17 U4.17 U5.17 U6.17 U7.17 | length 204.2
  Top Layer w0.254: U1.17 66.233,453.767 v1(69,451) ; v1(69,442) v1(103,442) v1(137,442) v1(171,442) 201.25,442 203.75,444.5 203.75,452 201.911,453.839 U7.17 ; U4.17 100.161,453.839 102.76,451.24 102.521,451 v1(103,451) ; U5.17 133.911,453.839 v1(137,450.75) ; U6.17 167.911,453.839 v1(171,450.75)
  Bottom Layer w0.254: v1(69,442) v1(69,451) ; v1(103,442) v1(103,451) ; v1(137,442) v1(137,450.75) ; v1(171,442) v1(171,450.75)
E_LED_ERR: R31.15
E_OUT1A: J5.1 U7.4 | length 25.5
  Top Layer w0.254: v1(191,459.25) v1@191.211,459.039
  Top Layer w0.6: v1@191.211,459.039 U7.4
  Bottom Layer w0.6: v1(191,459.25) 192.46,460.71 J5.1
E_OUT1B: J5.2 U7.25 | length 30
  Top Layer w0.254: v1@204.789,459.039 v1(205,459.25)
  Top Layer w0.6: J5.2 198.48,476.75 v1(198.5,476.75) ; U7.25 v1@204.789,459.039
  Bottom Layer w0.6: v1(198.5,476.75) 206.25,469 206.25,460.5 v1(205,459.25)
E_OUT2A: J5.3 U7.11 | length 33.6
  Top Layer w0.6: v1(191,453.75) 191.739,454.489 U7.11
  Bottom Layer w0.6: v1(191,453.75) 193.75,456.5 193.75,475.75 J5.3
E_OUT2B: J5.4 U7.18 | length 36
  Top Layer w0.6: U7.18 203.011,454.489 v1(205,452.5)
  Bottom Layer w0.6: J5.4 207.25,473.52 207.25,454.998 205,452.748 v1(205,452.5)
ESPI_SCK: U2.10 U3.4
ESPI_SDI: U2.11 U3.2
ESPI_SDO: U2.12 U3.3
ESPI_SS: U2.14 U3.5
ETH_INT: U2.18 U3.28
ETH_RESET: U3.6
GND: *1.10 *1.11 *1.13 *1.14 C1.2 C3.1 C5.2 C6.2 C7.1 C8.1 C9.1 C10.1 C11.1 C12.1 C13.1 C14.1 C16.1 C17.2 C19.1 C20.1 C21.1 C22.1 C23.1 C24.1 C25.1 C26.1 C27.1 C30.1 C31.1 C32.1 C33.1 C34.1 C35.1 C36.1 C39.1 C40.1 C41.1 C42.1 C43.1 C44.1 C45.1 C47.2 C48.2 C49.2 C50.2 C51.2 C52.2 C53.2 C54.2 C56.1 C57.1 C58.1 C59.1 C60.1 C61.1 C62.1 D1.2 D2.2 D3.2 D4.2 D5.2 D6.2 J1.5 J1.9 J1.10 J1.11 J2.5 J2.9 J2.10 J2.11 J3.5 J3.9 J3.10 J3.11 J6.6 J6.7 J6.8 J6.9 J6.10 J6.11 P1.3 P2.6 R4.1 R5.1 R6.1 R7.1 R8.1 R15.1 R17.CW R18.1 R19.1 R20.1 R21.1 R22.1 R25.1 R26.1 R27.1 R28.1 R29.1 R33.CW R34.1 R35.1 R36.1 R37.1 R38.1 R41.1 R42.1 R43.1 R44.1 R45.1 R53.CW R55.CW R57.CW R58.1 R59.1 R60.1 R61.1 R62.1 U1.7 U1.16 U1.21 U1.29 U2.15 U2.31 U2.36 U2.45 U2.65 U2.75 U3.7 U3.14 U3.17 U3.18 U3.26 U3.29 U4.7 U4.16 U4.21 U4.29 U5.7 U5.16 U5.21 U5.29 U6.7 U6.16 U6.21 U6.29 U7.7 U7.16 U7.21 U7.29 U8.1 | length 46.7
  Top Layer w0.254: C10.1 50.15,462.85 R6.1 ; C14.1 C8.1 50.75,460.5 R6.1@50.75,462.25 ; U1.21 C11.1@72.25,456.367 ; U4.21 105.911,456.439 C24.1 ; U5.21 140.161,456.439 C33.1 ; U6.21 174.161,456.439 C42.1 ; U7.21 208.161,456.439 C59.1 ; R6.1 R6.1@50.75,462.25 ; R6.1 R6.1@50.75,462.25
  other v2: 136.4,369.5 137.6,369.5 138.8,369.5 140,369.5 136.4,370.7 137.6,370.7 138.8,370.7 140,370.7 136.4,371.9 137.6,371.9 138.8,371.9 140,371.9 136.4,373.1 137.6,373.1 138.8,373.1 140,373.1
Net*1_3: *1.3 C20.2 L1.2 R13.1 R14.1 | length 19.4
  Top Layer w0.254: L1.2 108.85,374.25 R14.1 R13.1 ; C20.2 113.25,374.75 R13.1 ; *1.3 113.919,367.419 115,368.5 115,373.25 114,374.25 R13.1
Net*1_6: *1.6 C19.2 R11.1 R12.1 | length 13.8
  Top Layer w0.254: *1.6 117.5,366.751 117.5,373 R11.1 ; C19.2 119.15,376.65 118.75,376.25 R11.1 ; R12.1 R11.1
Net*1_9: *1.9 R10.2
Net*1_12: *1.12 R9.2
NetC2_1: C2.1 U1.22 | length 11
  Top Layer w0.254: U1.22 74.617,457.017 C2.1
NetC3_2: C3.2 U2.85
NetC4_1: C4.1 U1.24 | length 8.3
  Top Layer w0.254: U1.24 69.817,458.317 72.1,460.6 C4.1
NetC4_2: C4.2 U1.23 | length 7.1
  Top Layer w0.254: U1.23 C4.2@72.017,457.667
NetC5_1: C5.1 U3.25
NetC6_1: C6.1 U3.19 Y1.1
NetC7_2: C7.2 U3.20 Y1.2
NetC8_2: C8.2 R4.2 U1.6 | length 8.5
  Top Layer w0.254: R4.2@52.5,460.25 52.5,458.75 53.583,457.667 U1.6
NetC9_2: C9.2 R5.2 U1.9 | length 9.1
  Top Layer w0.254: R5.2 52.25,453.25 C9.2 53.217,455.717 U1.9
NetC10_2: C10.2 R2.1 R6.2 U1.5 | length 14.8
  Top Layer w0.254: R2.1 52.5,465 R6.2 53.75,461.25 53.75,458.75 54.183,458.317 U1.5
NetC11_2: C11.2 U1.20 | length 8.3
  Top Layer w0.254: U1.20 69.783,455.717 72.1,453.4 C11.2
NetC12_2: C12.2 R7.2 U1.14 | length 7.8
  Top Layer w0.254: U1.14 59.076,446.582 R7.2
  Top Layer w0.6: R7.2@59.094,446.5 R7.2
  Top Layer w1: C12.2 R7.2@59.094,446.5
NetC13_2: C13.2 R8.2 U1.1 | length 7.9
  Top Layer w0.254: R8.2@59.024,466.75 59.076,466.802 U1.1
  Top Layer w1: C13.2 R8.2@59.024,466.75
NetC14_2: C14.2 R17.W U1.8 | length 13.5
  Top Layer w0.254: R17.W@45.75,456 51.766,456 52.133,456.367 52.25,456.367 U1.8
NetC15_1: C15.1 U4.22 | length 10.9
  Top Layer w0.254: U4.22 108.689,457.089 C15.1
NetC16_2: C16.2 U2.74 Y2.2
NetC17_1: C17.1 U2.73 Y2.1
NetC18_1: C18.1 U4.24 | length 8.3
  Top Layer w0.254: U4.24 98.928,458.361 104.011,458.361 C18.1
NetC18_2: C18.2 U4.23 | length 7.4
  Top Layer w0.254: U4.23 106.089,457.739 C18.2
NetC21_2: C21.2 R18.2 U4.6 | length 9.1
  Top Layer w0.254: R18.2 86.5,459 C21.2 87.261,457.739 U4.6
NetC22_2: C22.2 R19.2 U4.9 | length 9.1
  Top Layer w0.254: R19.2 86.5,454.5 C22.2 87.289,455.789 U4.9
NetC23_2: C23.2 R16.1 R20.2 U4.5 | length 14.6
  Top Layer w0.254: R16.1 R20.2 87.75,461.25 87.75,459 88.389,458.361 93.072,458.361 U4.5
NetC24_2: C24.2 U4.20 | length 8.3
  Top Layer w0.254: U4.20 103.861,455.789 C24.2
NetC25_2: C25.2 R21.2 U4.14 | length 2.1
  Top Layer w0.254: R21.2@93.13,446.5 R21.2
  Top Layer w1: C25.2 R21.2@93.13,446.5
NetC26_2: C26.2 R22.2 U4.1 | length 2.1
  Top Layer w0.254: C26.2@91.1,466.75 C26.2@91.202,466.852
  Top Layer w1: C26.2@91.202,466.852 R22.2
NetC27_2: C27.2 R33.W U4.8 | length 13.4
  Top Layer w0.254: R33.W@80.75,456 86,456 86.25,456.25 86.25,456.5 C27.2 86.811,456.439 U4.8
NetC28_1: C28.1 U5.22 | length 11.2
  Top Layer w0.254: U5.22 142.939,457.089 C28.1
NetC29_1: C29.1 U5.24 | length 8.5
  Top Layer w0.254: U5.24@132.9,458.361 138.261,458.361 C29.1
NetC29_2: C29.2 U5.23 | length 7.7
  Top Layer w0.254: U5.23 C29.2@140.339,457.739
  Top Layer w0.6: C29.2@140.339,457.739 C29.2
NetC30_2: C30.2 R25.2 U5.6 | length 8.9
  Top Layer w0.254: R25.2 120.75,459 C30.2 121.511,457.739 U5.6
NetC31_2: C31.2 R26.2 U5.9 | length 8.9
  Top Layer w0.254: R26.2 120.5,453.25 C31.2 121.539,455.789 U5.9
NetC32_2: C32.2 R23.1 R27.2 U5.5 | length 14.7
  Top Layer w0.254: R23.1 R27.2 122,461.25 122,458.5 122.139,458.361 127.072,458.361 U5.5
NetC33_2: C33.2 U5.20 | length 8.6
  Top Layer w0.254: U5.20 138.111,455.789 C33.2
NetC34_2: C34.2 R28.2 U5.14 | length 1.9
  Top Layer w0.254: R28.2@127.166,446.5 R28.2
  Top Layer w1: C34.2 R28.2@127.166,446.5
NetC35_2: C35.2 R29.2 U5.1 | length 1.9
  Top Layer w0.254: R29.2@127.096,466.75 R29.2
  Top Layer w1: C35.2 R29.2@127.096,466.75
NetC36_2: C36.2 R53.W U5.8 | length 13.2
  Top Layer w0.254: R53.W@115,456.046 115.046,456 120.25,456 120.5,456.25 C36.2 121.061,456.439 U5.8
NetC37_1: C37.1 U6.22 | length 11.2
  Top Layer w0.254: U6.22 176.939,457.089 C37.1
NetC38_1: C38.1 U6.24 | length 8.5
  Top Layer w0.254: U6.24 166.928,458.361 172.261,458.361 C38.1
NetC38_2: C38.2 U6.23 | length 7.7
  Top Layer w0.254: U6.23 174.339,457.739 C38.2
NetC39_2: C39.2 R34.2 U6.6 | length 9.1
  Top Layer w0.254: R34.2 154.25,460.25 C39.2 155.261,457.739 U6.6
NetC40_2: C40.2 R35.2 U6.9 | length 9.1
  Top Layer w0.254: R35.2 154.25,453.25 C40.2 155.289,455.789 U6.9
NetC41_2: C41.2 R32.1 R36.2 U6.5 | length 14.6
  Top Layer w0.254: R32.1 R36.2 155.75,461.25 155.75,459 156.389,458.361 161.072,458.361 U6.5
NetC42_2: C42.2 U6.20 | length 8.6
  Top Layer w0.254: U6.20 172.111,455.789 C42.2
NetC43_2: C43.2 R37.2 U6.14 | length 1.6
  Top Layer w0.254: R37.2@161.202,446.5 R37.2
  Top Layer w1: C43.2 R37.2@161.202,446.5
NetC44_2: C44.2 R38.2 U6.1 | length 1.7
  Top Layer w0.254: R38.2@161.132,466.75 R38.2
  Top Layer w1: C44.2 R38.2@161.132,466.75
NetC45_2: C45.2 R55.W U6.8 | length 13.5
  Top Layer w0.254: R55.W 154.25,456 C45.2 154.811,456.439 U6.8
NetC46_1: C46.1 U7.22 | length 11.2
  Top Layer w0.254: U7.22 210.939,457.089 C46.1
NetC55_1: C55.1 U7.24 | length 8.5
  Top Layer w0.254: U7.24 200.928,458.361 206.261,458.361 C55.1
NetC55_2: C55.2 U7.23 | length 7.7
  Top Layer w0.254: U7.23 208.339,457.739 C55.2
NetC56_2: C56.2 R41.2 U7.6 | length 9.1
  Top Layer w0.254: R41.2 188.25,460.25 C56.2 189.261,457.739 U7.6
NetC57_2: C57.2 R42.2 U7.9 | length 9.1
  Top Layer w0.254: R42.2 188.25,453.25 C57.2 189.289,455.789 U7.9
NetC58_2: C58.2 R39.1 R43.2 U7.5 | length 14.6
  Top Layer w0.254: R39.1 R43.2 189.75,461.25 189.75,459 190.389,458.361 195.072,458.361 U7.5
NetC59_2: C59.2 U7.20 | length 8.6
  Top Layer w0.254: U7.20 206.111,455.789 C59.2
NetC60_2: C60.2 R44.2 U7.14 | length 2
  Top Layer w0.254: R44.2@194.988,446.25 R44.2
  Top Layer w1: C60.2 R44.2@194.988,446.25
NetC61_2: C61.2 R45.2 U7.1 | length 1.7
  Top Layer w0.254: C61.2@193.6,466.75 C61.2@193.702,466.852
  Top Layer w1: C61.2@193.702,466.852 R45.2
NetC62_2: C62.2 R57.W U7.8 | length 13.4
  Top Layer w0.254: R57.W@182.75,456 188,456 188.25,456.25 C62.2 188.811,456.439 U7.8
NetD1_1: D1.1 R30.1 | length 13.7
  Top Layer w0.254: D1.1 165.46,361 169,361 172,364 172,365.745 R30.1
NetD1_3: D1.3 R30.2 | length 10
  Top Layer w0.254: D1.3 173.325,363.865 R30.2
NetD2_1: D2.1 R30.3 | length 9.5
  Top Layer w0.254: D2.1 174.595,362.515 R30.3
NetD2_3: D2.3 R30.4 | length 7.9
  Top Layer w0.254: D2.3 175.865,358.785 R30.4
NetD3_1: D3.1 R30.5 | length 8
  Top Layer w0.254: R30.5 177.135,358.845 D3.1
NetD3_3: D3.3 R30.6 | length 9.5
  Top Layer w0.254: R30.6 178.405,362.575 D3.3
NetD4_1: D4.1 R30.7 | length 10.1
  Top Layer w0.254: R30.7 179.675,363.925 D4.1
NetD4_3: D4.3 R30.8 | length 13.7
  Top Layer w0.254: R30.8 181,365.745 181,364 184,361 187.6,361 D4.3
NetD5_1: D5.1 R31.1 | length 9.4
  Top Layer w0.254: D5.1 197.255,362.315 R31.1
NetD5_3: D5.3 R31.2 | length 7.8
  Top Layer w0.254: D5.3 198.525,358.585 R31.2
NetD6_1: D6.1 R31.3 | length 8
  Top Layer w0.254: R31.3 199.795,359.045 D6.1
NetD6_3: D6.3 R31.4 | length 9.6
  Top Layer w0.254: R31.4 201.065,362.775 D6.3
NetD+1_1: D+1.1 D+1.3 J6.2 J6.3 J6.4 J6.5
NetD+2_1: D+2.1 J6.1
NetJ1_8: J1.8 R46.2 | length 17.3
  Top Layer w0.254: R46.2 51.5,478.25 54.75,481.5 62.045,481.5 J1.8
NetJ2_8: J2.8 R47.2 | length 17.1
  Top Layer w0.254: R47.2 85.5,478 89,481.5 96.045,481.5 J2.8
NetJ3_8: J3.8 R48.2 | length 17
  Top Layer w0.254: R48.2 119.75,478.25 123,481.5 130.045,481.5 J3.8
NetJ4_5: J4.5 J4.9 J4.10 J4.11
NetJ4_8: J4.8 R49.2 | length 16.9
  Top Layer w0.254: R49.2 153.75,478 157.25,481.5 164.045,481.5 J4.8
NetJ5_5: J5.5 J5.9 J5.10 J5.11
NetJ5_8: J5.8 R50.2 | length 16.7
  Top Layer w0.254: R50.2 187.5,477.25 191.75,481.5 198.045,481.5 J5.8
NetP1_1: P1.1
NetP2_2: P2.2
NetP2_3: P2.3
NetP2_4: P2.4
NetP2_5: P2.5
NetR3_1: R3.1 R17.CCW R58.2 | length 6.2
  Top Layer w0.254: R58.2 47.5,451.85 R17.CCW ; R17.CCW@47.5,451.2 R3.1
NetR9_1: R9.1 U3.22
NetR10_1: R10.1 U3.23
NetR24_1: R24.1 R33.CCW R59.2 | length 5
  Top Layer w0.254: R59.2 81.7,451.2 R24.1
NetR30_10: R30.10
NetR30_11: R30.11
NetR30_12: R30.12
NetR30_13: R30.13
NetR30_14: R30.14
NetR30_15: R30.15
NetR30_16: R30.16
NetR31_13: R31.13
NetR31_14: R31.14
NetR31_16: R31.16
NetR40_1: R40.1 R53.CCW R60.2 | length 5.2
  Top Layer w0.254: R60.2@116,448.75 116,451.2 R40.1
NetR52_2: R52.2 U2.82
NetR54_1: R54.1 R55.CCW R61.2 | length 5
  Top Layer w0.254: R61.2 149.8,451.2 R54.1
NetR56_1: R56.1 R57.CCW R62.2 | length 5.7
  Top Layer w0.254: R62.2 R57.CCW@183.8,451.85 ; R57.CCW@184.05,451.2 R56.1
  Top Layer w0.6: R57.CCW@183.6,451.65 R57.CCW@183.8,451.85
NetU2_13: U2.13
NULL_A: R1.7 U2.23
NULL_A_CON: J1.7 R1.10 | length 202
  Top Layer w0.254: v1(222.5,450) 222.675,449.825 R1.10
  Bottom Layer w0.254: J1.7 65.323,487.548 212.213,487.548 215.536,484.225 215.536,457.682 215.719,457.499 221.631,451.587 222.5,450.718 v1(222.5,450)
NULL_B: R1.5 U2.22
NULL_B_CON: J2.7 R1.12 | length 165.7
  Top Layer w0.254: v1(220,450) 220.135,449.865 R1.12
  Bottom Layer w0.254: J2.7 98.525,486.75 129.216,486.75 129.252,486.786 211.898,486.786 214.774,483.91 214.774,457.367 214.957,457.184 219.131,453.01 220,452.141 v1(220,450)
NULL_C: R1.3 U2.21
NULL_C_CON: J3.7 R1.14 | length 129.4
  Top Layer w0.254: v1(217.5,450) 217.595,449.905 R1.14
  Bottom Layer w0.254: J3.7 131.799,486.024 211.582,486.024 214.012,483.594 214.012,457.051 214.195,456.868 216.631,454.432 217.5,453.563 v1(217.5,450)
NULL_D: R1.1 U2.20
NULL_D_CON: J4.7 R1.16 | length 93.1
  Top Layer w0.254: v1(215,450) 215.055,449.945 R1.16
  Bottom Layer w0.254: J4.7 165.037,485.262 211.266,485.262 213.25,483.278 213.25,456.736 213.433,456.553 215,454.986 v1(215,450)
NULL_E_CON: J5.7 R52.1 | length 54.4
  Top Layer w0.254: R52.1@209.7,442.1 210.2,442.6 210.2,447.6 v1(212.6,450)
  Bottom Layer w0.254: J5.7 198.275,484.5 202.4,484.5 212.488,474.412 212.488,456.42 212.6,456.308 212.6,450.2 212.7,450.1 v1(212.6,450)
PGEC1: P1.5 U2.24
PGED1: P1.4 U2.25
POS_A: R1.8 U2.68
POS_A_CON: J1.6 R1.9 | length 207
  Top Layer w0.254: v1@223.75,448.25 v1(223.75,448.75) ; R1.9 v1@223.945,448.75
  Bottom Layer w0.254: J1.6 59.061,482.84 63.971,487.75 64.986,487.75 65.165,487.929 212.371,487.929 215.917,484.383 215.917,475.894 215.917,457.84 222.881,450.876 223.8,449.957 223.8,449.111 223.389,449.111 v1(223.75,448.75)
POS_B: R1.6 U2.69
POS_B_CON: J2.6 R1.11 | length 169.6
  Top Layer w0.254: v1(221.25,448.75) 221.405,448.595 R1.11
  Bottom Layer w0.254: J2.6 93.061,482.84 97.352,487.131 129.058,487.131 129.094,487.167 212.055,487.167 215.155,484.067 215.155,457.525 215.338,457.342 220.381,452.299 221.25,451.43 v1(221.25,448.75)
POS_C: R1.4 U2.70
POS_C_CON: J3.6 R1.13 | length 133.3
  Top Layer w0.254: v1(218.75,448.75) 218.865,448.635 R1.13
  Bottom Layer w0.254: J3.6 129.41,486.405 211.74,486.405 214.393,483.752 214.393,457.209 214.576,457.026 217.881,453.721 218.75,452.852 v1(218.75,448.75)
POS_D: R1.2 U2.71
POS_D_CON: J4.6 R1.15 | length 97.2
  Top Layer w0.254: v1(216.25,448.75) 216.325,448.675 R1.15
  Bottom Layer w0.254: J4.6 159.845,483.095 162.393,485.643 211.424,485.643 213.631,483.436 213.631,456.893 213.814,456.71 215.381,455.143 216.25,454.274 v1(216.25,448.75)
POS_E: R51.2 U2.79
POS_E_CON: J5.6 R51.1 | length 57.7
  Top Layer w0.254: R51.1@212.2,442.1 212.7,442.6 212.7,447.6 v1(213.8,448.7)
  Bottom Layer w0.254: J5.6 195.886,484.881 202.619,484.881 212.869,474.631 212.869,456.578 213.8,455.647 v1(213.8,448.7)
RBIAS: R15.2 U3.10 | length 34.2
  Top Layer w0.254: R15.2 116.25,366.2 117.75,364.7 117.75,363.475 118.4,362.825 120.325,362.825 122,364.5 122,370 123.95,371.95 U3.10
SYS_CLK: U2.63 U3.27
TP_IN_N: *1.7 R11.2 U3.8 | length 24.9
  Top Layer w0.254: R11.2 118.999,372.001 *1.7 ; R11.2@119.246,372.314 120.215,373.283 U3.8@135.325,373.283
TP_IN_P: *1.8 R12.2 U3.9 | length 21.3
  Top Layer w0.254: *1.8@120,366.791 *1.8 *1.8@120.025,366.766 ; *1.8@120.3,366.55 120.3,371.3 R12.2 R12.2@121.6,372.6 ; R12.2@121.775,372.775 R12.2@121.6,372.6 ; U3.9 R12.2@121.6,372.6
TPOUT1_N: *1.2 R13.2 U3.12 | length 21.5
  Top Layer w0.254: R13.2 112.649,371.149 *1.2 112.395,366.268 112.395,365.847 112.395,363.423 113.818,362 121.211,362 123.092,363.881
TPOUT1_P: *1.1 R14.2 U3.13 | length 22.1
  Top Layer w0.254: R14.2 111.379,372.121 *1.1 ; *1.1@111.887,364.014 111.617,363.744 111.617,363.483 113.481,361.619 121.369,361.619 123.25,363.5
VCC: C48.1 C49.1 C50.1 C51.1 C52.1 C53.1 C54.1 L1.1 P1.2 P2.1 R2.2 R3.2 R16.2 R23.2 R24.2 R32.2 R39.2 R40.2 R46.1 R47.1 R48.1 R49.1 R50.1 R54.2 R56.2 U1.10 U2.2 U2.16 U2.30 U2.37 U2.46 U2.62 U2.86 U3.11 U3.15 U3.16 U3.21 U3.24 U4.10 U5.10 U6.10 U7.10 U8.4 | length 382.8
  Top Layer w0.254: R2.2 50.5,468.75 v1(51.5,469.75) R46.1 ; C49.1@52.85,448.7 52.5,449.05 R3.2 53.2,451.2 53.75,451.75 53.75,454.5 54.317,455.067 U1.10 ; R16.2 84.5,468.75 v1(85.5,469.75) R47.1 ; C50.1@86.75,448.5 86.75,448.7 86.75,450.5 87.75,451.5 87.75,454.25 88.639,455.139 U4.10 ; R23.2 118.75,468.75 v1(119.75,469.75) R48.1 ; C51.1@121,449 121,451 122,452 122,454.25 122.889,455.139 U5.10 ; R32.2 152.5,468.75 v1(153.5,469.75) 153.75,470 R49.1 ; C52.1@154.75,449 154.75,450.75 155.75,451.75 155.75,454.25 156.639,455.139 U6.10 ; R39.2 186.5,468.75 v1(187.5,469.75) R50.1 ; R56.2 189.2,451.2 189.75,451.75 189.75,454 190.889,455.139 U7.10
  Top Layer w0.6: v1(51.5,440.75) v1(85.5,440.75) v1(119.75,440.75) v1(153.5,440.75) v1(187.5,440.75) ; v1(51.5,446.5) 52.85,447.85 C49.1@52.85,448.7 ; v1(85.5,446.5) 86.75,447.75 86.75,448.7 C50.1 ; v1(119.75,446.5) 121.15,447.9 C51.1 ; v1(153.5,446.5) 154.85,447.85 C52.1 ; v1(187.5,446.25) 188.85,447.6 C53.1 188.85,450.85 R56.2
  Bottom Layer w0.6: v1(51.5,440.75) v1(51.5,446.5) 51.5,450.25 v1(51.5,469.75) ; v1(85.5,440.75) v1(85.5,446.5) v1(85.5,469.75) ; v1(119.75,440.75) v1(119.75,446.5) v1(119.75,469.75) ; v1(153.5,440.75) v1(153.5,446.5) v1(153.5,469.75) ; v1(187.5,440.75) v1(187.5,446.25) v1(187.5,469.75)
  other v1: 128.5,370.75
pads on no net: *1.4 *1.5 *1.15 *1.16 P1.6 R31.5 R31.6 R31.7 R31.8 R31.9 R31.10 R31.11 R31.12 U2.1 U2.3 U2.4 U2.5 U2.6 U2.7 U2.8 U2.9 U2.17 U2.19 U2.26 U2.27 U2.28 U2.29 U2.32 U2.33 U2.34 U2.35 U2.38 U2.39 U2.40 U2.41 U2.42 U2.43 U2.44 U2.47 U2.48 U2.49 U2.50 U2.51 U2.52 U2.53 U2.54 U2.55 U2.56 U2.57 U2.58 U2.59 U2.60 U2.61 U2.64 U2.66 U2.67 U2.72 U2.76 U2.77 U2.78 U2.80 U2.81 U2.83 U2.84 U2.87 U2.88 U2.89 U2.90 U2.91 U2.92 U2.93 U2.94 U2.95 U2.96 U2.97 U2.98 U2.99 U2.100 U3.1

## Polygon pours and split planes (outlines as drawn)
NetC61_2 on Top Layer "Top Layer-No Net" (solid, pour order 1009): 194.25,468.75 196,468.75 196,460.75 194.25,460.75
NetC60_2 on Top Layer "Top Layer-No Net" (solid, pour order 1008): 194.25,452.75 196,452.75 196,444.5 194.25,444.5
NetC43_2 on Top Layer "Top Layer-No Net" (solid, pour order 1007): 160.25,452.75 162,452.75 162,444.5 160.25,444.5
NetC44_2 on Top Layer "Top Layer-No Net" (solid, pour order 1006): 160.25,468.75 162,468.75 162,460.75 160.25,460.75
NetC35_2 on Top Layer "Top Layer-No Net" (solid, pour order 1005): 126.25,468.75 128,468.75 128,460.75 126.25,460.75
NetC34_2 on Top Layer "Top Layer-No Net" (solid, pour order 1004): 126.25,452.75 128,452.75 128,444.5 126.25,444.5
NetC26_2 on Top Layer "Top Layer-No Net" (solid, pour order 1003): 92.25,468.75 94,468.75 94,460.75 92.25,460.75
NetC25_2 on Top Layer "Top Layer-No Net" (solid, pour order 1002): 92.25,452.75 94,452.75 94,444.5 92.25,444.5
NetC12_2 on Top Layer "Top Layer-No Net" (solid, pour order 1001): 58.25,452.75 60,452.75 60,444.5 58.25,444.5
NetC13_2 on Top Layer "Top Layer-No Net" (solid, pour order 1000): 58.25,468.75 60,468.75 60,460.75 58.25,460.75
GND on InternalPlane2 (split plane): 229.49,350.51 30.51,350.51 30.51,489.49 229.49,489.49
GND on InternalPlane1 (split plane): 229.49,350.51 30.51,350.51 30.51,489.49 229.49,489.49

## Text inside footprints (layer, text, board x,y; h text height)
C1: Top Overlay "+" at 37.769,377.202 h1.5
C47: Top Overlay "+" at 76.879,371.414 h1.5 r90
C48: Top Overlay "+" at 83.356,371.414 h1.5 r90
J1: Top Overlay "6" at 57.345,485.945 h1.5; Top Overlay "9" at 65.655,485.945 h1.5; Top Overlay "5" at 67.04,476.545 h1.5; Top Overlay "1" at 56.21,476.545 h1.5
J2: Top Overlay "6" at 91.345,485.945 h1.5; Top Overlay "9" at 99.655,485.945 h1.5; Top Overlay "5" at 101.04,476.545 h1.5; Top Overlay "1" at 90.21,476.545 h1.5
J3: Top Overlay "6" at 125.345,485.945 h1.5; Top Overlay "9" at 133.655,485.945 h1.5; Top Overlay "5" at 135.04,476.545 h1.5; Top Overlay "1" at 124.21,476.545 h1.5
J4: Top Overlay "6" at 159.345,485.945 h1.5; Top Overlay "9" at 167.655,485.945 h1.5; Top Overlay "5" at 169.04,476.545 h1.5; Top Overlay "1" at 158.21,476.545 h1.5
J5: Top Overlay "6" at 193.345,485.945 h1.5; Top Overlay "9" at 201.655,485.945 h1.5; Top Overlay "5" at 203.04,476.545 h1.5; Top Overlay "1" at 192.21,476.545 h1.5
J6: Top Overlay "6" at 68.155,354.227 h1.5 r180; Top Overlay "9" at 59.845,354.227 h1.5 r180; Top Overlay "5" at 58.46,363.627 h1.5 r180; Top Overlay "1" at 69.29,363.627 h1.5 r180